# Altium PCB NUC972 DEV BOARD-2 20150128.PcbDoc (part 1 of 5)
Units mil, origin at the board's own origin, x right, y up, seen from the top; angles counter-clockwise.
Board outline 10236.22 x 7677.17 mil, 4 copper layers (Top, 2-GND, 3-POWER, Bottom), stack 35.4 mil thick; 572 components, 593 nets, 2369 pads, 1783 vias.
Unrouted connection lines stored in the file: 1277.
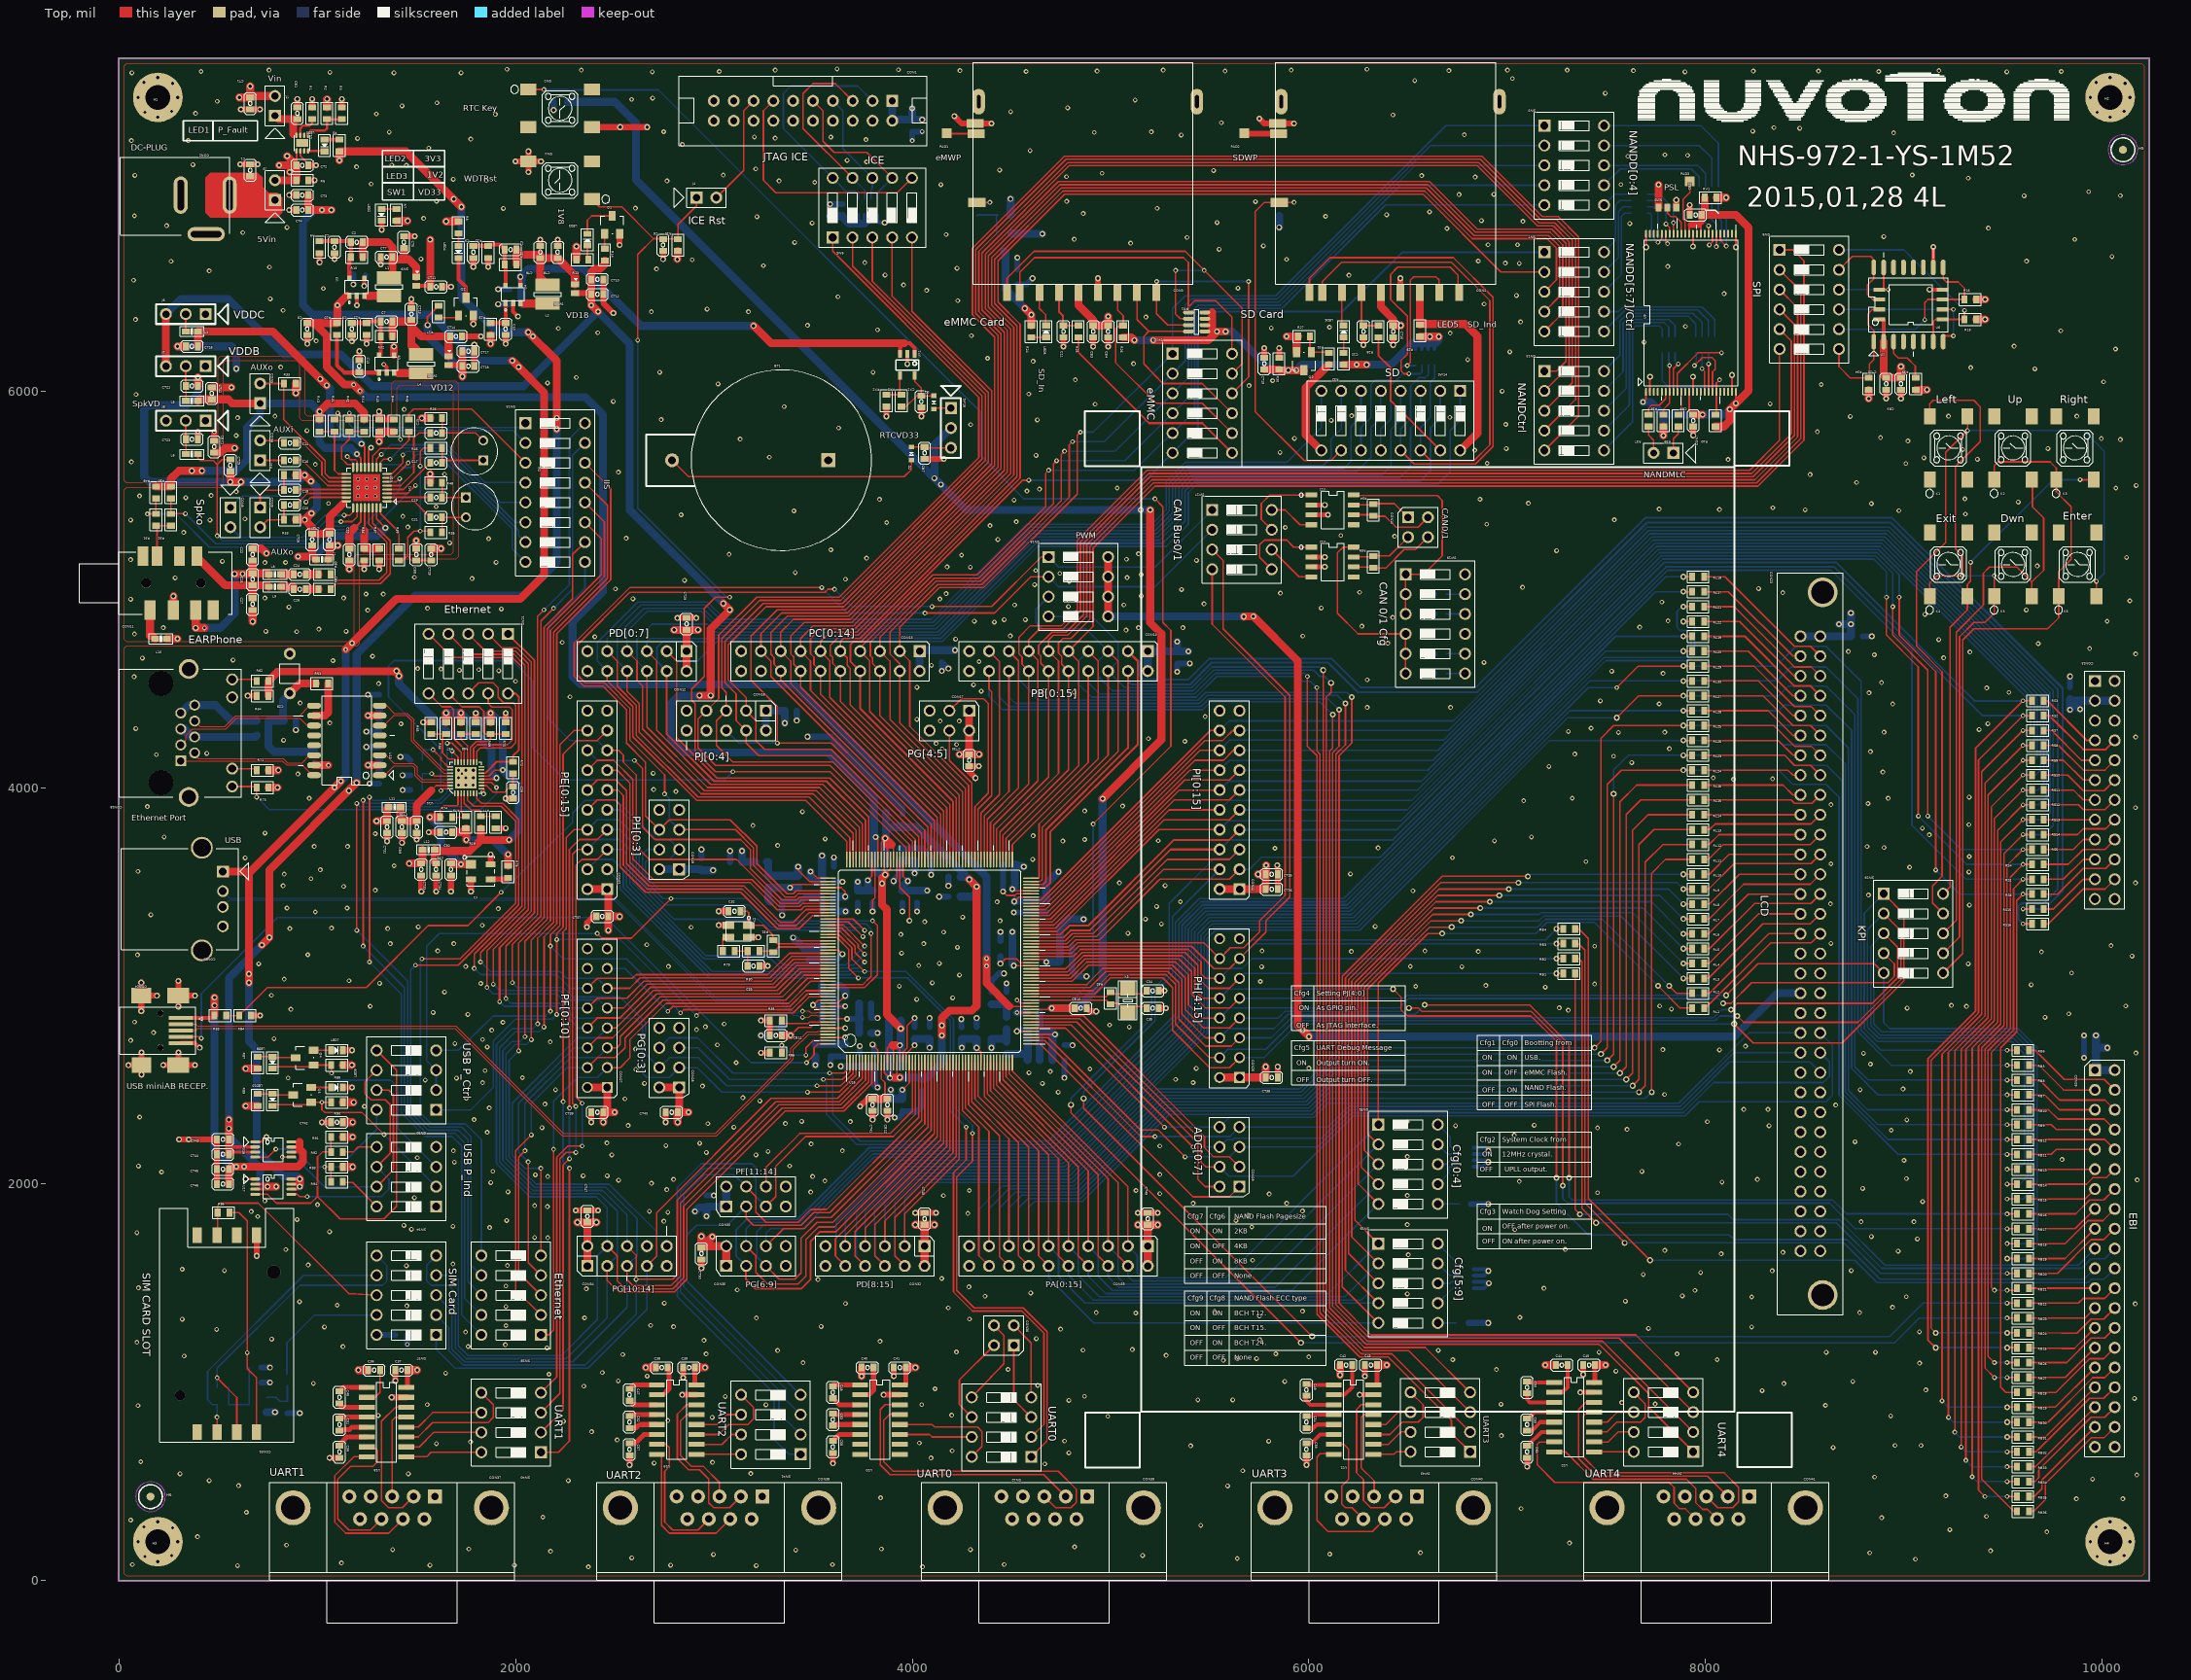
[diagram p0: Top view]
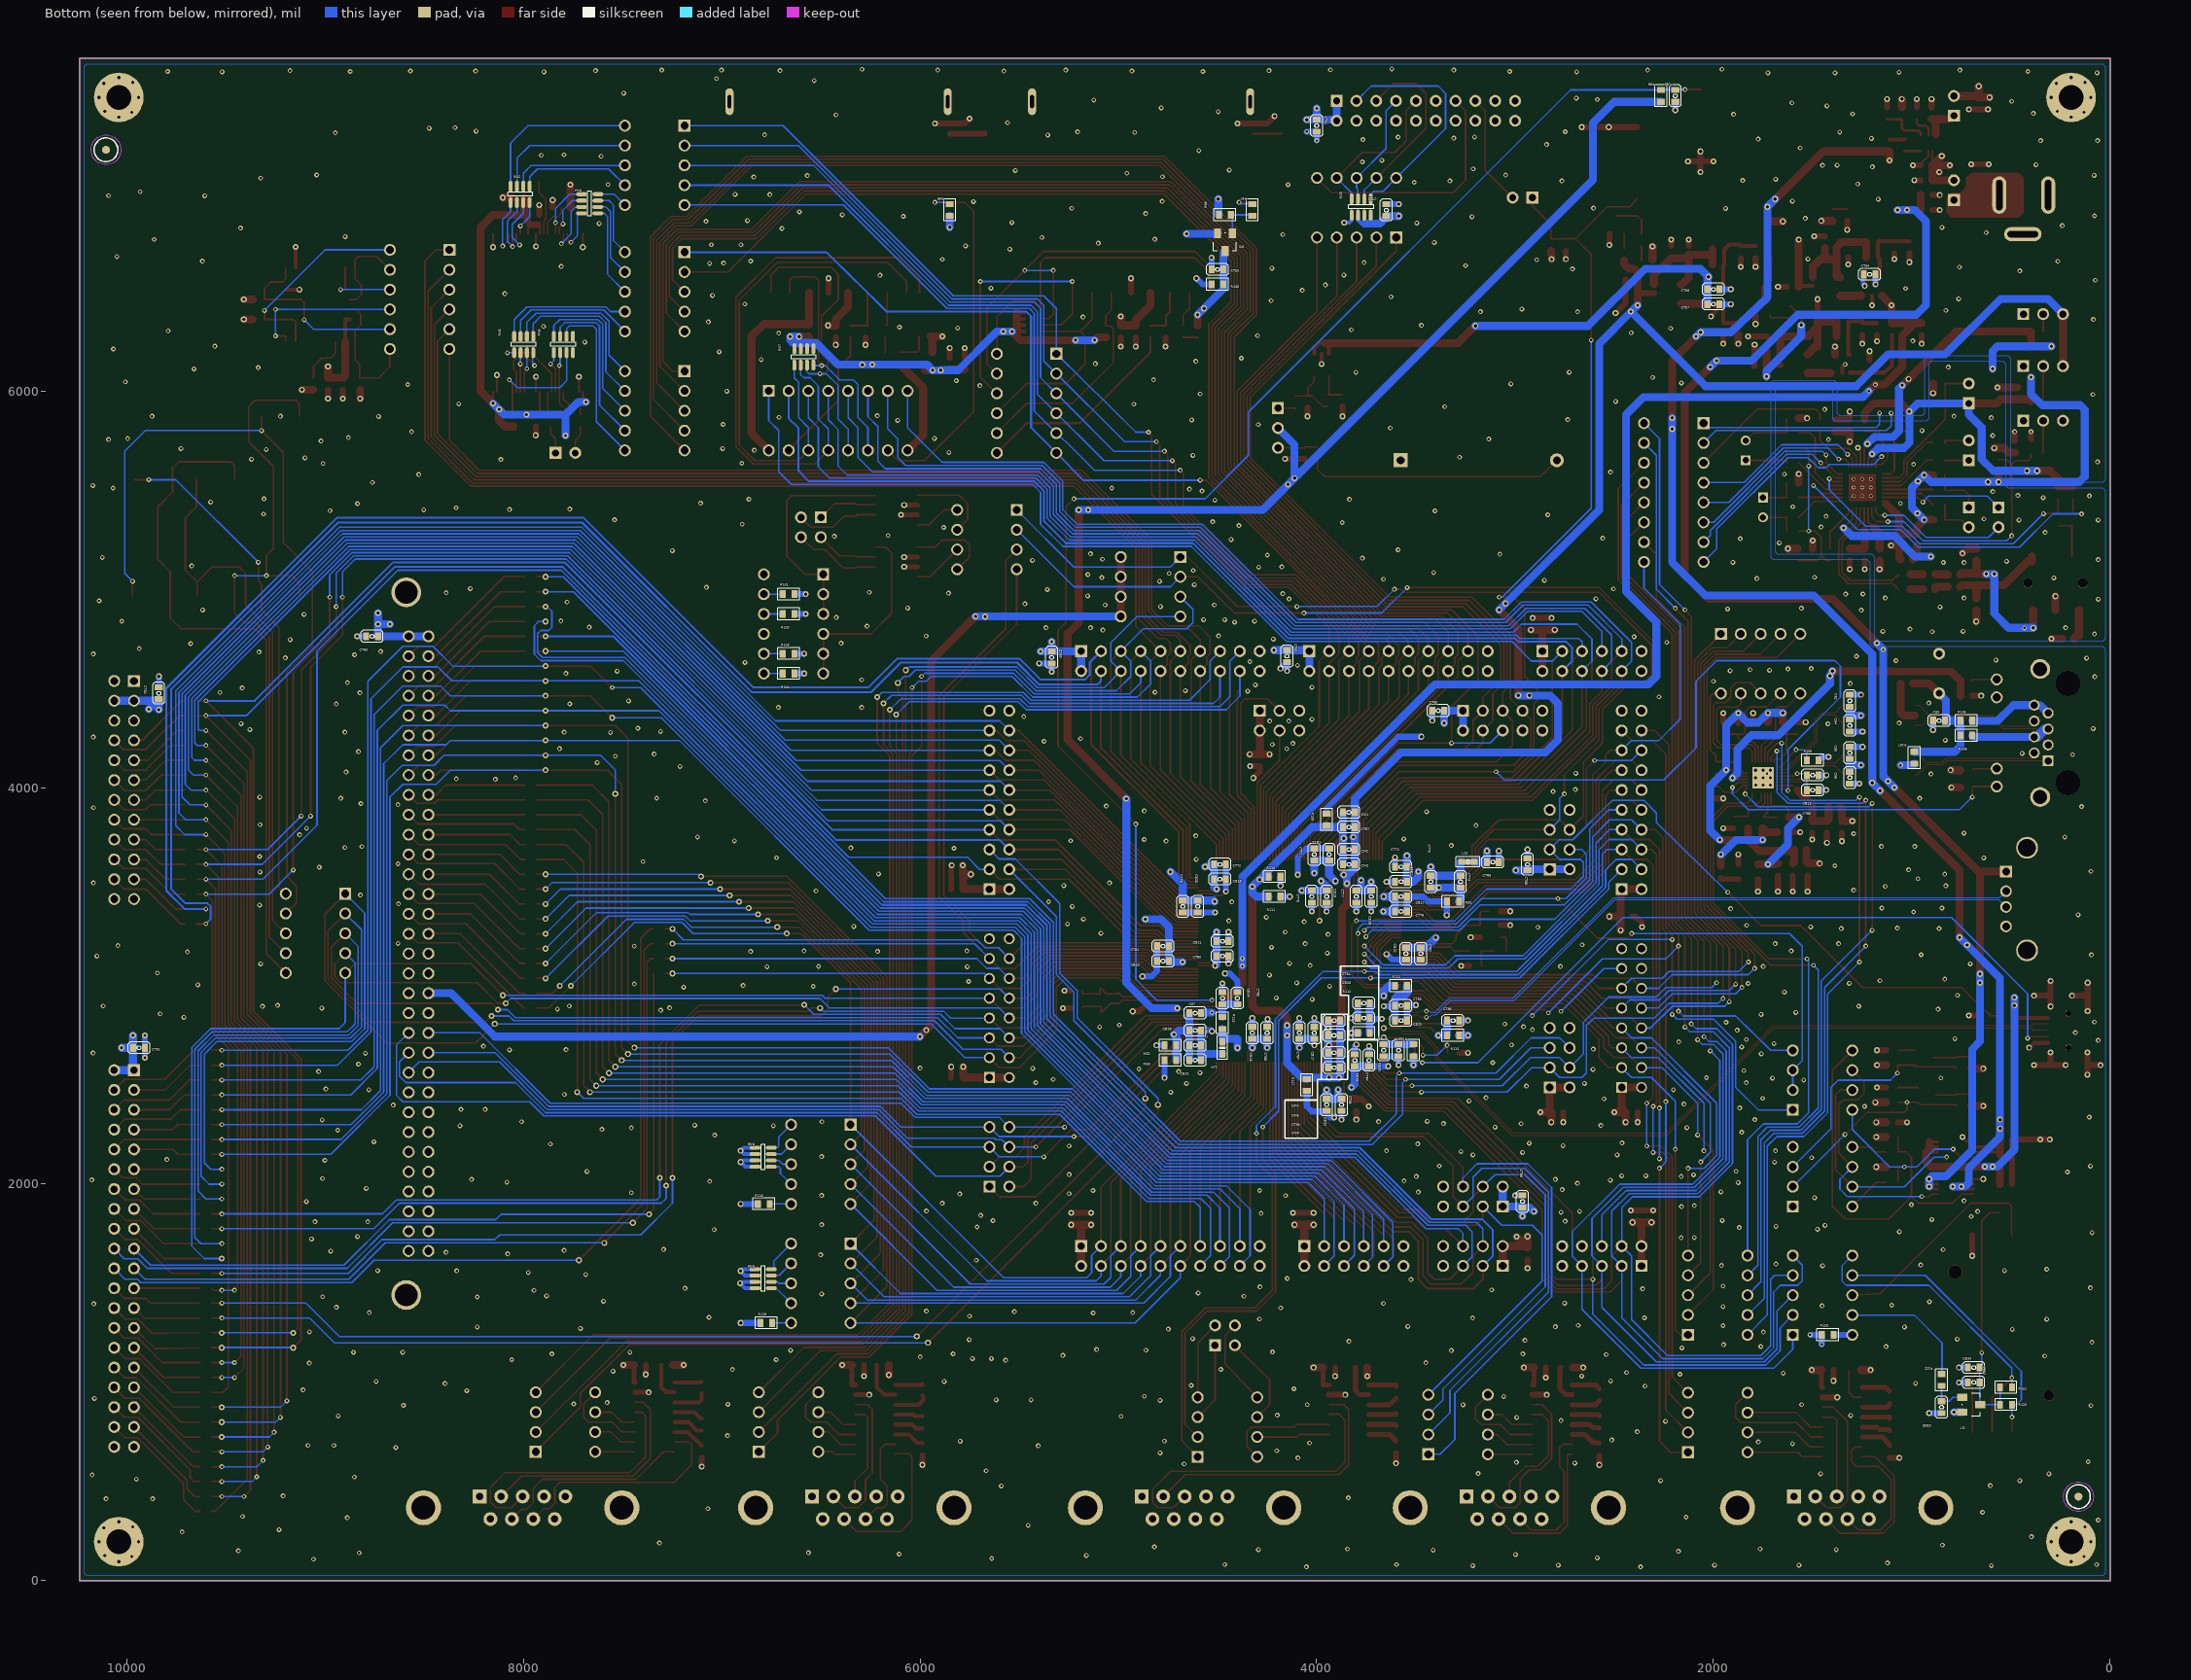
[diagram p1: Bottom view, seen from below]
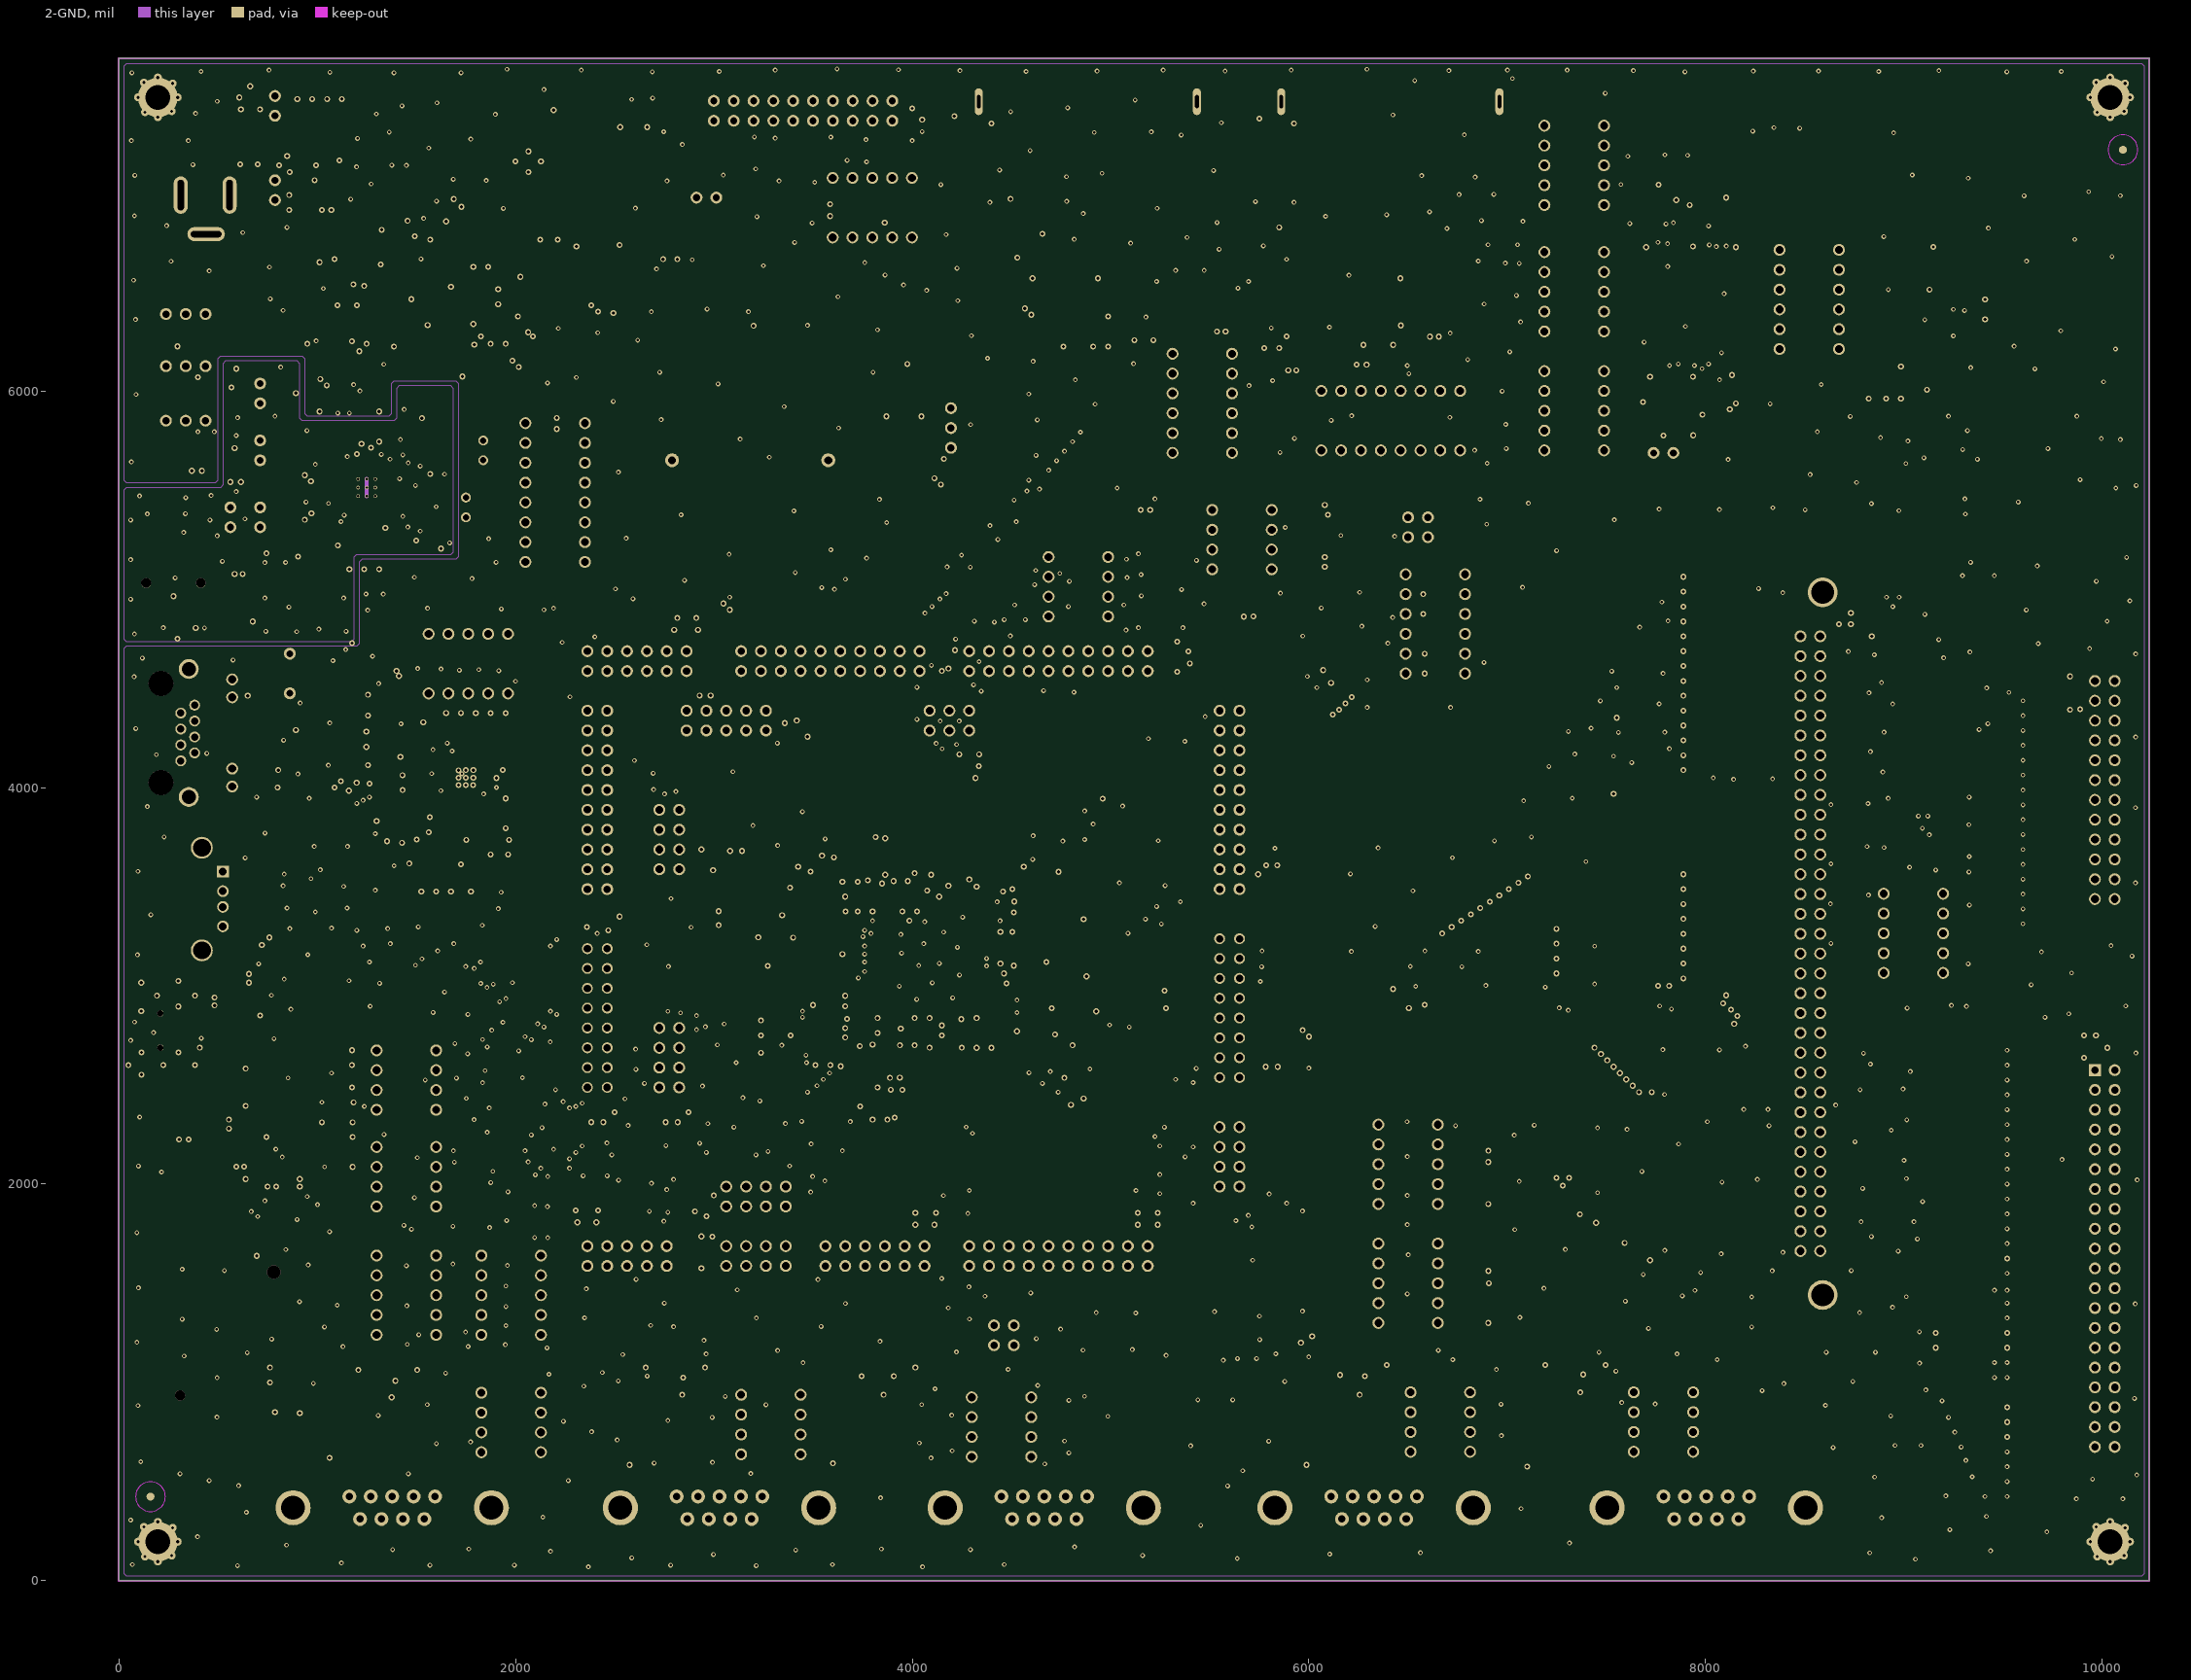
[diagram p2: 2-GND]
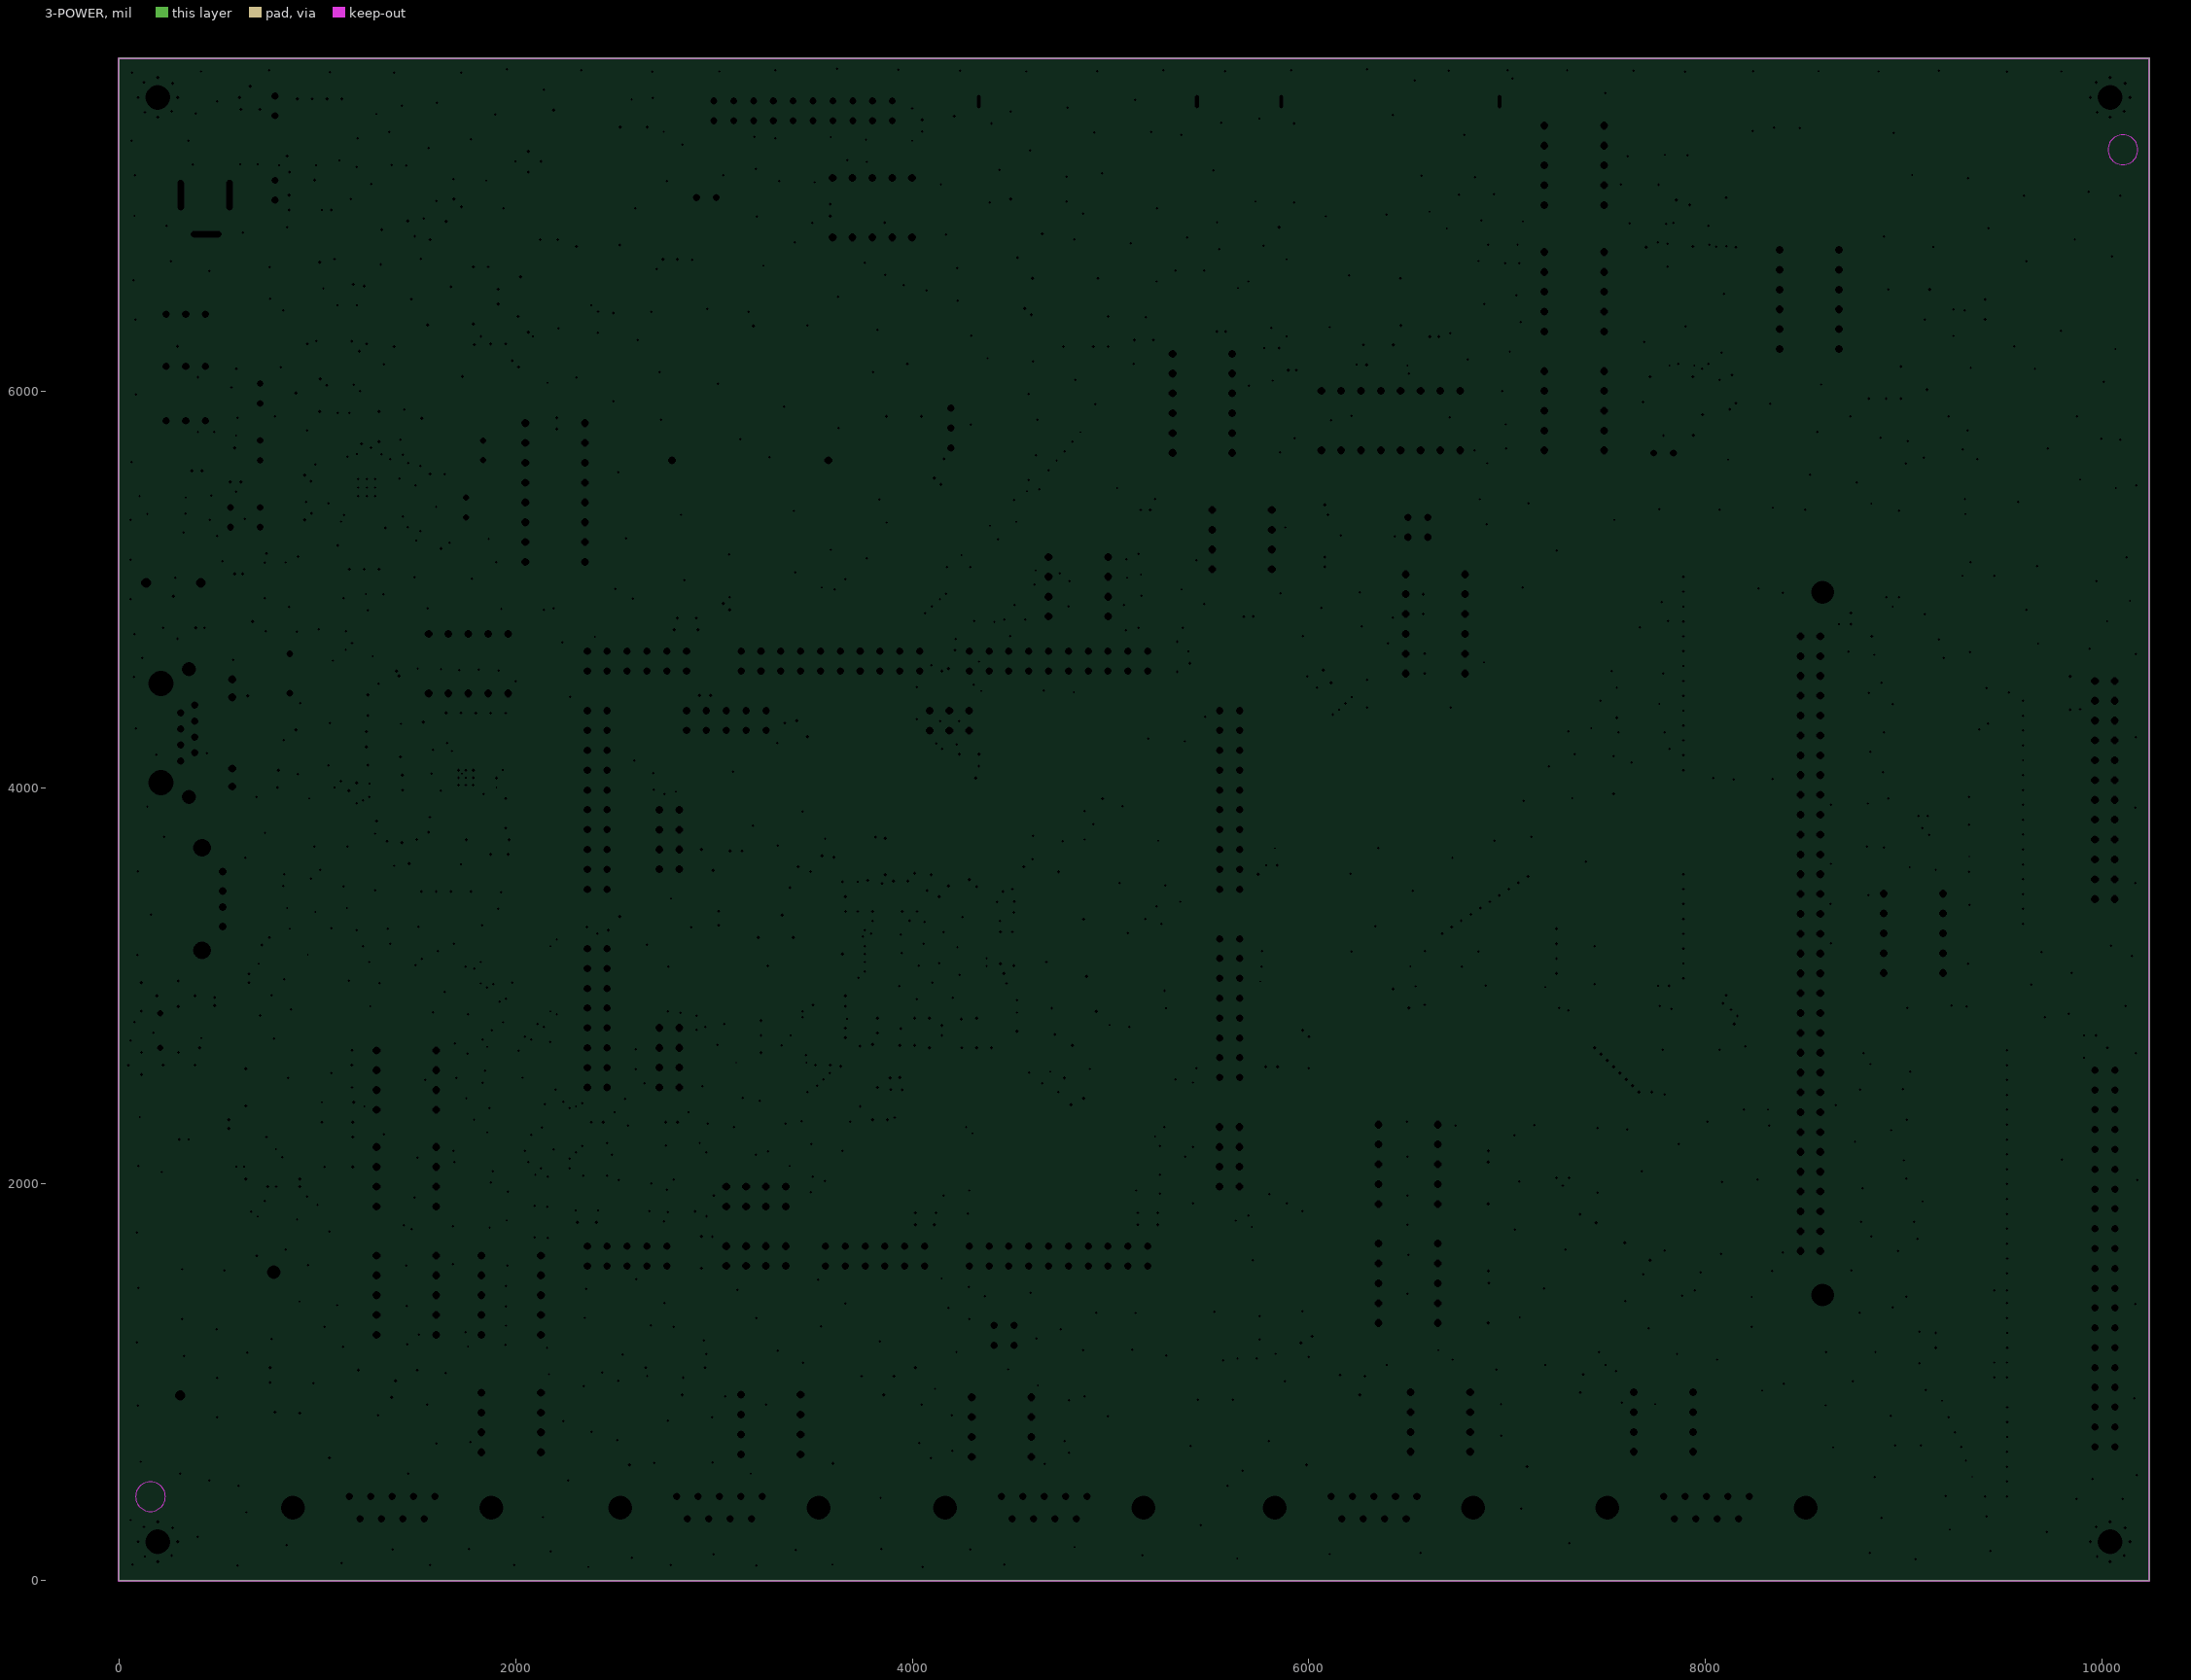
[diagram p3: 3-POWER, clearances drawn from the general rule]

## Layer stack, top to bottom
Solder Mask Top: solder mask 0.4, Solder Resist, Dk 3.5
Top: signal copper 1.35
Dielectric 1: dielectric 10, FR-4, Dk 4.3
2-GND: signal copper 1.35
Dielectric2: dielectric 10, FR-4, Dk 4.3
3-POWER: plane copper 1.35
Dielectric3: dielectric 10, FR-4, Dk 4.3
Bottom: signal copper 1.35
Solder Mask Bottom: solder mask 0.4, Solder Resist, Dk 3.5

## Board outline
0,0 10236.22,0 10236.22,7677.17 0,7677.17

## Design rules (kind name [scope] priority, off if disabled: settings)
Clearance "Clearance - NetClass - ETHERNET-4/8/4-100OHM" [InNetClass('ETHERNET-4/8/4-100OHM')] p1: gap=10 ignorepadtopadclearanceinfootprint=FALSE except(0: Arc-Hole Track-Hole SMDPad-Hole THPad-Hole Via-Hole Fill-Hole Poly-Hole Region-Hole Text-Hole; 7: Arc-SMDPad Arc-THPad Arc-Via Arc-Text Track-SMDPad Track-THPad Track-Via Track-Text SMDPad-SMDPad SMDPad-THPad SMDPad-Via SMDPad-Text THPad-THPad THPad-Via THPad-Text Via-Via Via-Text Fill-Text Poly-Text Region-Text; 8: Arc-Arc Arc-Track Track-Track)
Clearance "Clearance - NetClass - USB-5/7/5-90OHM" [InNetClass('USB-5/7/5-90OHM')] p2: gap=7 ignorepadtopadclearanceinfootprint=FALSE except(0: Arc-Hole Track-Hole SMDPad-Hole THPad-Hole Via-Hole Fill-Hole Poly-Hole Region-Hole Text-Hole; 10: Arc-Fill Arc-Poly Arc-Region Track-Fill Track-Poly Track-Region SMDPad-Fill SMDPad-Poly SMDPad-Region THPad-Fill THPad-Poly THPad-Region Via-Fill Via-Poly Via-Region Fill-Fill Fill-Poly Fill-Region Poly-Poly Poly-Region Region-Region Text-Text)
Clearance "Clearance - Default - DEFAULT - Via" [IsVia vs IsVia] p3: gap=6 ignorepadtopadclearanceinfootprint=FALSE
Clearance "Clearance - Default - DEFAULT- SMD" [IsVia vs IsSMTPin] p4: gap=6 ignorepadtopadclearanceinfootprint=FALSE
Clearance "Clearance - Default - DEFAULT - Net" [All] p5: gap=10 ignorepadtopadclearanceinfootprint=FALSE except(0: Arc-Hole Track-Hole SMDPad-Hole THPad-Hole Via-Hole Fill-Hole Poly-Hole Region-Hole Text-Hole; 5: Arc-SMDPad Arc-THPad Track-SMDPad Track-THPad SMDPad-SMDPad SMDPad-THPad SMDPad-Via THPad-THPad THPad-Via; 7: Arc-Arc Arc-Track Arc-Via Arc-Text Track-Track Track-Via Track-Text SMDPad-Text THPad-Text Via-Via Via-Text Fill-Text Poly-Text Region-Text)
ComponentClearance "ComponentClearance - Default - DEFAULT" [All] p1: gap=6 collisioncheckmode=3 verticalgap=10 showdistances=FALSE
FanoutControl Fanout_SOIC [IsSOIC] p1: bgadir=Out bgaviamode=Centered fanoutstyle=Auto fanoutdirection=Alternating viagrid=1 // Fanout_SOIC (Default Rule)
FanoutControl Fanout_Small [(CompPinCount < 5)] p2: bgadir=Out bgaviamode=Centered fanoutstyle=Auto fanoutdirection=OutThenIn viagrid=1 // Fanout_Small (Default Rule)
FanoutControl Fanout_LCC [IsLCC] p3: bgadir=Out bgaviamode=Centered fanoutstyle=Auto fanoutdirection=Alternating viagrid=1 // Fanout_LCC (Default Rule)
FanoutControl Fanout_BGA [IsBGA] p4: bgadir=Out bgaviamode=Centered fanoutstyle=Auto fanoutdirection=Alternating viagrid=1 // Fanout_BGA (Default Rule)
HoleToHoleClearance "HoleToHoleClearance - Default - DEFAULT" [All] p1: gap=6 allowstackedmicrovias=TRUE
Length "Default Length" [All] p1: maxlimit=50000 minlimit=0
MaxMinImpedance "Default Impedance" [All] p1: minimum=50.00 maximum=150.0
ParallelSegment "Default Parallel Segment Adjasent" [All] p1: limit=1000 gap=200
ParallelSegment "Default Parallel Segment Same Layer" [All] p2: limit=1000 gap=200
PlaneClearance [All] p1: clearance=20
PlaneConnect "Default PlaneConnect" [All] p1: planeconnectstyle=Relief reliefexpansion=20 reliefentries=0 reliefconductorwidth=20 reliefairgap=10
PolygonConnect "PolygonConnect - Default SMT" [IsSMTPin] p1: connectstyle=Relief reliefconductorwidth=10 reliefentries=4 polygonreliefangle="45 Angle" airgapwidth=10
PolygonConnect "PolygonConnect - Default Pad" [All] p2: connectstyle=Relief reliefconductorwidth=20 reliefentries=4 polygonreliefangle="45 Angle" airgapwidth=10
RoutingLayers "RoutingLayers - Default - DEFAULT" [All] p1: top layer_v5=TRUE mid layer 1_v5=TRUE bottom layer_v5=TRUE
RoutingPriority "RoutingPriority - Default - DEFAULT" [All] p1: routingpriority=3
RoutingTopology "RoutingTopology - NetClass - POWER-40MIL" [InNetClass('POWER-40MIL') vs InNetClass('POWER-40MIL')] p1: topology=Shortest
RoutingTopology "Default Routing Topology" [All] p2: topology=Shortest
RoutingVias "RoutingVias - Default - DEFAULT" [All] p1: holewidth=16 width=30 viastyle="Through Hole" minholewidth=16 minwidth=30 maxholewidth=16 maxwidth=30
SMDToCorner "SMDToCorner - Default - DEFAULT" [All] p1: distance=60000
SolderMaskExpansion "SolderMaskExpansion from CAM settings" [All] p1: expansion=3
Width "Width - NetClass - POWER-40MIL" [InNetClass('POWER-40MIL')] p1: maxlimit=100 minlimit=1 preferedwidth=40
Width "Width - NetClass - USB-5/7/5-90OHM" [InNetClass('USB-5/7/5-90OHM')] p2: maxlimit=100 minlimit=1 preferedwidth=5
Width "Width - NetClass - ETHERNET-4/8/4-100OHM" [InNetClass('ETHERNET-4/8/4-100OHM')] p3: maxlimit=100 minlimit=1 preferedwidth=4
Width "Width - NetClass - POWER-30MIL" [InNetClass('POWER-30MIL')] p4: maxlimit=100 minlimit=1 preferedwidth=30
Width "Default Width" [All] p5: maxlimit=100 minlimit=1 preferedwidth=8
19 further rules are at their usual default settings.

## Classes and differential pairs
net class ETHERNET-4/8/4-100OHM: MDI_RN MDI_RP MDI_TN MDI_TP RX+ RX- TX+ TX-
net class POWER-30MIL: VS
net class POWER-40MIL: 5VIN AVD33 AVS CDAVS CDCAVS CDCVS EMVD33 MVS NVD33 PHYAD3 PHYAVD33 PHYIOVD33 PLLVD12 PLLVS SDPWR SDVD33 UDVD33 UHVD33 UOVD33 UPL0VD12 UPL1VD12 VD12 VD18 VD33 VDDA VDDB VDDC VIN VREF
net class USB-5/7/5-90OHM: UDH0 UDH1 UDO0 UDO1

## Components (designator, comment, footprint, x,y, rotation, side; value= is the part's Value field where it differs from the comment)
BT1 "BAT$5C$CR2032-4-2" BAT$5C$CR2032-4-2 3183,5650.5 r0 top
C1 "C0603" C0603 662.5,7112.5 r90 top
C2 "C0603" C0603 1200,6750 r0 top
C3 "C0603" C0603 1975,6712.5 r180 top
C4 "C0603" C0603 1087.5,6725 r90 top
C5 "C0603" C0603 1787.5,6700 r270 top
C6 "C0603" C0603 2744,6736 r90 top
C7 "C0603" C0603 1350,6350 r180 top
C8 "C0603" C0603 950,6312.5 r270 top
C9 "C0603" C0603 1175,6312.5 r270 top
C10 "C0603" C0603 1950,6312.5 r270 top
C11 "C0603" C0603 4762.5,6300 r270 top
C12 "C0603" C0603 6275,6300 r270 top
C13 "C0603" C0603 1212.5,6125 r90 top
C14 "C0603" C0603 862.5,5737.5 r0 top
C15 "C0603" C0603 1600,5787.5 r0 top
C16 "C0603" C0603 862.5,5650 r0 top
C17 "C0603" C0603 1600,5637.5 r0 top
C18 "C0603" C0603 862.5,5500 r0 top
C19 "C0603" C0603 1600,5462.5 r0 top
C20 "C0603" C0603 862.5,5425 r0 top
C21 "C0603" C0603 1600,5362.5 r0 top
C22 "C0603" C0603 675,5175 r270 top
C23 "C0603" C0603 1162.5,5175 r90 top
C24 "C0603" C0603 912.5,5075 r0 top
C25 "C0603" C0603 675,5050 r90 top
C26 "C0603" C0603 912.5,5000 r0 top
C27 "C0603" C0603 675,4925 r90 top
C28 "CK05" CK05 862.5,4575 r90 top
C29 "C0603" C0603 1987.5,3975 r270 top
C30 "C0603" C0603 1650,3775 r180 top
C31 "C0603" C0603 1674.5,3587 r270 top
C32 "C0603" C0603 3104,3376 r180 top
C33 "C0603" C0603 3200,3100 r0 top
C34 "C0603" C0603 5212.5,2975 r0 top
C35 "C0603" C0603 5212.5,2887.5 r0 top
C36 "C0603" C0603 1287.5,1062.5 r180 top
C37 "C0603" C0603 1425,1062.5 r180 top
C38 "C0603" C0603 2737.5,1075 r180 top
C39 "C0603" C0603 2875,1075 r180 top
C40 "C0603" C0603 3775,1075 r180 top
C41 "C0603" C0603 3937.5,1075 r180 top
C42 "C0603" C0603 6187.5,1087.5 r180 top
C43 "C0603" C0603 6312.5,1087.5 r180 top
C44 "C0603" C0603 7275,1087.5 r180 top
C45 "C0603" C0603 7412.5,1087.5 r180 top
C46 "C0603" C0603 1112.5,925 r90 top
C47 "C0603" C0603 2575,937.5 r90 top
C48 "C0603" C0603 3600,950 r90 top
C49 "C0603" C0603 5987.5,962.5 r90 top
C50 "C0603" C0603 7100,975 r90 top
C51 "C0603" C0603 1112.5,787.5 r90 top
C52 "C0603" C0603 2575,800 r90 top
C53 "C0603" C0603 3600,812.5 r90 top
C54 "C0603" C0603 5987.5,800 r90 top
C55 "C0603" C0603 7100,787.5 r90 top
C56 "C0603" C0603 1112.5,650 r90 top
C57 "C0603" C0603 2575,662.5 r90 top
C58 "C0603" C0603 3600,675 r90 top
C59 "C0603" C0603 5987.5,662.5 r90 top
C60 "C0603" C0603 7100,650 r90 top
C61 "C0603" C0603 2192,7488 r270 bottom
C62 "C0603" C0603 1312.5,4437.5 r90 bottom
C63 "C0603" C0603 862.5,4337.5 r0 bottom
C64 "C0603" C0603 1312.5,4312.5 r270 bottom
C65 "C0603" C0603 1312.5,4175 r90 bottom
C66 "C0603" C0603 1312.5,4050 r270 bottom
C67 "C0603" C0603 4612.5,2862.5 r180 bottom
CB1 "C0603" C0603 900,7400 r90 top
CB2 "C0603" C0603 7950,6887.5 r180 top
CB3 "C0603" C0603 4912.5,6300 r90 top
CB4 "C0603" C0603 4987.5,6300 r90 top
CB5 "C0603" C0603 8985,6036 r270 top
CB6 "C0603" C0603 7937.5,5850 r270 top
CB7 "C0603" C0603 4062.5,5687.5 r270 top
CB8 "C0603" C0603 1500,5175 r270 top
CB9 "C0603" C0603 1427.5,3801 r90 top
CB10 "C0603" C0603 4850,2887.5 r0 top
CB11 "C0603" C0603 3312.5,2750 r180 top
CB12 "C0603" C0603 3875,2400 r270 top
CB13 "C0603" C0603 1499.5,4062 r0 bottom
CB14 "C0603" C0603 3937.5,3662.5 r90 bottom
CB15 "C0603" C0603 3575,3525 r0 bottom
CB16 "C0603" C0603 4487.5,3537.5 r180 bottom
CB17 "C0603" C0603 3575,3450 r180 bottom
CB18 "C0603" C0603 3725,3450 r270 bottom
CB19 "C0603" C0603 3950,3450 r270 bottom
CB20 "C0603" C0603 4600,3400 r270 bottom
CB21 "C0603" C0603 4475,3225 r180 bottom
CB22 "C0603" C0603 3550,3162.5 r270 bottom
CB23 "C0603" C0603 4775,3125 r0 bottom
CB24 "C0603" C0603 4475,2937.5 r90 bottom
CB25 "C0603" C0603 3575,2825 r180 bottom
CB26 "C0603" C0603 3762.5,2837.5 r0 bottom
CB27 "C0603" C0603 4012.5,2762.5 r90 bottom
CB28 "C0603" C0603 4325,2762.5 r90 bottom
CB29 "C0603" C0603 4612.5,2775 r0 bottom
CB30 "C0603" C0603 3662.5,2675 r270 bottom
CB31 "C0603" C0603 4612.5,2625 r180 bottom
CB32 "C0603" C0603 3808,2624 r90 bottom
CB33 "C0603" C0603 3950,2400 r270 bottom
CB34 "C0603" C0603 687.5,1075 r180 bottom
CB35 "C0603" C0603 850,875 r90 bottom
CBX1 "C0603" C0603 481.25,5718.75 r270 top
CM1 "C0603" C0603 3837.5,3875 r0 bottom
CM2 "C0603" C0603 3837.5,3687.5 r0 bottom
CM3 "C0603" C0603 3837.5,3612.5 r0 bottom
CM4 "C0603" C0603 3912.5,2825 r180 bottom
CM5 "C0603" C0603 3912.5,2750 r180 bottom
CM6 "C0603" C0603 3912.5,2587.5 r180 bottom
CON1 "HEADER10X2$5C$BOX" HEADER10X2$5C$BOX 3900,7462.5 r0 top
CON2 "POWRJACK$5C$3P" POWRJACK$5C$3P 312.5,6987.5 r90 top
CON3 "AXA2R63061" AXA2R63061 4862.5,6537.5 r180 top
CON4 "AXA2R63061" AXA2R63061 6387.5,6537.5 r180 top
CON5 "SIP$5C$2P-2.54M" SIP$5C$2P-2.54M 712.5,5937.5 r90 top
CON6 "SIP$5C$2P-2.54M" SIP$5C$2P-2.54M 712.5,5650 r90 top
CON7 "SIP$5C$2P-2.54M" SIP$5C$2P-2.54M 7837.5,5687.5 r180 top
CON8 "SIP$5C$2P-2.54M" SIP$5C$2P-2.54M 562.5,5412.5 r270 top
CON9 "SIP$5C$2P-2.54M" SIP$5C$2P-2.54M 712.5,5412.5 r270 top
CON10 "HEADER2X2" HEADER2X2 6500,5362.5 r270 top
CON11 "JACK$5C$PJK-691" JACK$5C$PJK-691 0,5031.2 r0 top
CON12 "HEADER_2X6_2.54MM" HEADER_2X6_2.54MM 2862.5,4687.5 r180 top
CON13 "HEADER10X2$5C$2.54" HEADER10X2$5C$2.54 4037.5,4687.5 r180 top
CON14 "HEADER10X2$5C$2.54" HEADER10X2$5C$2.54 5187.5,4687.5 r180 top
CON15 "HEADER12X2-2.54M" HEADER12X2-2.54M 9962.5,4537.5 r270 top
CON16 "CON$2F$5X2B$2F$2.54$2F$M" CON$2F$5X2B$2F$2.54$2F$M 3262.5,4387.5 r180 top
CON17 "HEADER_2X3_2.54MM" HEADER_2X3_2.54MM 4287.5,4387.5 r180 top
CON18 "RJ45-8P8C$2F$LED" RJ45-8P8C$2F$LED 212.5,4275 r270 top
CON19 "HEADER2X4" HEADER2X4 2825,3587.5 r90 top
CON20 "USB4P_ATYPE" USB4P_ATYPE 525,3437.5 r270 top
CON21 "HEADER10X2$5C$2.54" HEADER10X2$5C$2.54 2462.5,3487.5 r90 top
CON22 "HEADER10X2$5C$2.54" HEADER10X2$5C$2.54 5650,3487.5 r90 top
CON23 "M_DIN_32X2$2F$2.54A" M_DIN_32X2$2F$2.54A 8528.15,3212.6 r270 top
CON24 "MINI_5P_B_TYPE" MINI_5P_B_TYPE 300,2950 r90 top
CON25 "HEADER8X2$5C$2.54" HEADER8X2$5C$2.54 5650,2537.5 r90 top
CON26 "HEAD20X2-2.54M" HEAD20X2-2.54M 9962.5,2575 r270 top
CON27 "HEADER8X2$5C$2.54" HEADER8X2$5C$2.54 2462.5,2487.5 r90 top
CON28 "HEADER2X4" HEADER2X4 2825,2487.5 r90 top
CON29 "HEADER2X4" HEADER2X4 5650,1987.5 r90 top
CON30 "HEADER2X4" HEADER2X4 3062.5,1887.5 r0 top
CON31 "SIM-CARD" SIM-CARD 545,1742 r270 top
CON32 "HEADER_2X6_2.54MM" HEADER_2X6_2.54MM 4062.5,1687.5 r180 top
CON33 "HEADER10X2$5C$2.54" HEADER10X2$5C$2.54 5187.5,1687.5 r180 top
CON34 "CON$2F$5X2B$2F$2.54$2F$M" CON$2F$5X2B$2F$2.54$2F$M 2362.5,1587.5 r0 top
CON35 "HEADER2X4" HEADER2X4 3062.5,1587.5 r0 top
CON36 "HEADER2X2" HEADER2X2 4512.5,1187.5 r90 top
CON37 "DB9FM-L" DB9FM-L 1162.5,425 r0 top
CON38 "DB9FM-L" DB9FM-L 2812.5,425 r0 top
CON39 "DB9FM-L" DB9FM-L 4450,425 r0 top
CON40 "DB9FM-L" DB9FM-L 6112.5,425 r0 top
CON41 "DB9FM-L" DB9FM-L 7787.5,425 r0 top
CT1 "C0603" C0603 662.5,7450 r270 top
CT2 "C0603" C0603 925,7137.5 r180 top
CT3 "C0603" C0603 925,6987.5 r0 top
CT4 "C0603" C0603 925,6912.5 r0 top
CT5 "C0603" C0603 1437.5,6750 r90 top
CT6 "C0603" C0603 2125,6700 r90 top
CT7 "C0603" C0603 1350,6675 r180 top
CT8 "C0603" C0603 2212.5,6700 r90 top
CT10 "C0603" C0603 2412.5,6562.5 r0 top
CT11 "C0603" C0603 1600,6525 r0 top
CT12 "C0603" C0603 2412.5,6487.5 r0 top
CT13 "C0603" C0603 1475,6387.5 r90 top
CT14 "C0603" C0603 1700,6275 r0 top
CT15 "C0603" C0603 6425,6300 r90 top
CT16 "C0603" C0603 368.75,6225 r0 top
CT17 "C0603" C0603 1762.5,6200 r0 top
CT18 "C0603" C0603 1762.5,6125 r0 top
CT19 "C0603" C0603 5775,6137.5 r270 top
CT20 "C0603" C0603 8910,6036 r270 top
CT21 "C0603" C0603 368.75,6025 r180 top
CT22 "C0603" C0603 468.75,5987.5 r270 top
CT23 "C0603" C0603 368.75,5756.25 r180 top
CT25 "C0603" C0603 562.5,5625 r90 top
CT26 "C0603" C0603 975,5250 r270 top
CT27 "C0603" C0603 1062.5,5250 r270 top
CT28 "C0603" C0603 1575,5175 r270 top
CT29 "C0603" C0603 2862.5,4825 r270 top
CT30 "C0603" C0603 4287.5,4137.5 r90 top
CT31 "C0603" C0603 1352.5,3801 r270 top
CT32 "C0603" C0603 1502.5,3801 r270 top
CT33 "C0603" C0603 1524.5,3587 r270 top
CT34 "C0603" C0603 1599.5,3587 r270 top
CT35 "C0603" C0603 5812.5,3562.5 r180 top
CT36 "C0603" C0603 5812.5,3487.5 r180 top
CT37 "C0603" C0603 2437.5,3350 r0 top
CT38 "C0603" C0603 5812.5,2537.5 r180 top
CT39 "C0603" C0603 2412.5,2362.5 r0 top
CT40 "C0603" C0603 2787.5,2362.5 r0 top
CT41 "C0603" C0603 3800,2400 r270 top
CT42 "C0603" C0603 1100,2312 r0 top
CT43 "C0603" C0603 525,2225.5 r0 top
CT44 "C0603" C0603 525,2150.5 r0 top
CT45 "C0603" C0603 525,2075.5 r0 top
CT46 "C0603" C0603 525,2000.5 r0 top
CT47 "C0603" C0603 2362.5,1837.5 r270 top
CT48 "C0603" C0603 4062.5,1825 r270 top
CT49 "C0603" C0603 5187.5,1825 r270 top
CT50 "C0603" C0603 2937.5,1650 r90 top
CT51 "C0603" C0603 4000,7337.5 r90 bottom
CT52 "C0603" C0603 3649,6911.5 r270 bottom
CT54 "C0603" C0603 1212.5,6587.5 r180 bottom
CT55 "C0603" C0603 4500,6612.5 r180 bottom
CT56 "C0603" C0603 2000,6512.5 r180 bottom
CT57 "C0603" C0603 2000,6437.5 r180 bottom
CT60 "C0603" C0603 8762.5,4762.5 r180 bottom
CT62 "C0603" C0603 4150,4662.5 r90 bottom
CT63 "C0603" C0603 5336,4656 r90 bottom
CT64 "C0603" C0603 9837.5,4475 r270 bottom
CT65 "C0603" C0603 3387.5,4387.5 r180 bottom
CT66 "C0603" C0603 1499.5,3987 r180 bottom
CT67 "C0603" C0603 3837.5,3800 r0 bottom
CT68 "C0603" C0603 2937.5,3612.5 r270 bottom
CT69 "C0603" C0603 3112,3624 r180 bottom
CT70 "C0603" C0603 3575,3600 r0 bottom
CT71 "C0603" C0603 4012.5,3662.5 r90 bottom
CT72 "C0603" C0603 4487.5,3612.5 r180 bottom
CT73 "C0603" C0603 3275,3525 r270 bottom
CT75 "C0603" C0603 3425,3525 r90 bottom
CT76 "C0603" C0603 3575,3375 r180 bottom
CT77 "C0603" C0603 3800,3450 r270 bottom
CT78 "C0603" C0603 4025,3450 r270 bottom
CT79 "C0603" C0603 4675,3400 r270 bottom
CT80 "C0603" C0603 4475,3150 r180 bottom
CT81 "C0603" C0603 4775,3200 r0 bottom
CT82 "C0603" C0603 3475,3162.5 r270 bottom
CT83 "C0603" C0603 3575,2900 r180 bottom
CT84 "C0603" C0603 3762.5,2912.5 r0 bottom
CT85 "C0603" C0603 4400,2937.5 r90 bottom
CT86 "C0603" C0603 3312.5,2825 r180 bottom
CT87 "C0603" C0603 4087.5,2762.5 r90 bottom
CT88 "C0603" C0603 4250,2762.5 r90 bottom
CT90 "C0603" C0603 4612.5,2700 r180 bottom
CT91 "C0603" C0603 9937.5,2687.5 r0 bottom
CT92 "C0603" C0603 3587.5,2675 r270 bottom
CT93 "C0603" C0603 3912.5,2662.5 r180 bottom
CT94 "C0603" C0603 3736,2624 r90 bottom
CT95 "C0603" C0603 3875,2400 r270 bottom
CT96 "C0603" C0603 2962.5,1912.5 r270 bottom
CT97 "C0603" C0603 687.5,1000 r180 bottom
CX1 "C0603" C0603 4046,5946.5 r270 top
D1 "DIDEO_A" DIDEO_A 4108,5975.5 r270 top
D2 "DIDEO_A" DIDEO_A 3995.5,5650.5 r90 top
H1 "H-250" H-250 196.85,7480.31 r0 top
H2 "H-250" H-250 10039.37,7480.31 r0 top
H3 "H-250" H-250 196.85,196.85 r0 top
H4 "H-250" H-250 10039.37,196.85 r0 top
H5 "VIA40N(F_MASK)4L" VIA40N(F_MASK)4L 10104,7216 r0 top
H6 "VIA40N(F_MASK)4L" VIA40N(F_MASK)4L 160,424 r0 top
J2 "SIP$5C$2P-2.54M" SIP$5C$2P-2.54M 787.5,7387.5 r90 top
J3 "SIP$5C$2P-2.54M" SIP$5C$2P-2.54M 787.5,6962.5 r90 top
J4 "SIP$5C$2P-2.54M" SIP$5C$2P-2.54M 2912.5,6975 r0 top
J6 "SIP-3P-2.54M" SIP-3P-2.54M 437.5,6387.5 r180 top
J7 "SIP-3P-2.54M" SIP-3P-2.54M 437.5,6125 r180 top
J8 "SIP-3P-2.54M" SIP-3P-2.54M 437.5,5850 r180 top
K1 "SW4-SMD" SW4-SMD 9225,5712.5 r0 top
K2 "SW4-SMD" SW4-SMD 9550,5712.5 r0 top
K3 "SW4-SMD" SW4-SMD 9862.5,5712.5 r0 top
K4 "SW4-SMD" SW4-SMD 9225,5125 r0 top
K5 "SW4-SMD" SW4-SMD 9550,5125 r0 top
K6 "SW4-SMD" SW4-SMD 9875,5125 r0 top
L1 "SMTDR43" SMTDR43 1362.5,6525 r180 top
L2 "SMTDR43" SMTDR43 2162.5,6487.5 r180 top
L3 "L0603" L0603 368.75,6300 r180 top
L4 "SMTDR43" SMTDR43 1525,6137.5 r180 top
L5 "L0603" L0603 368.75,5950 r180 top
L6 "L0603" L0603 368.75,5681.25 r180 top
L7 "L0603" L0603 1025,5150 r0 top
L8 "L0603" L0603 787.5,5075 r180 top
L9 "L0603" L0603 787.5,5012.5 r180 top
L10 "L0603" L0603 212.5,4750 r180 top
L11 "L0603" L0603 1390,3901 r0 top
L12 "L0603" L0603 1562,3687 r0 top
L13 "L0603" L0603 3237.5,3625 r0 bottom
L14 "L0603" L0603 4475,2687.5 r270 bottom
LED1 "LED_0603" LED_0603 1037.5,7237.5 r270 top
LED2 "LED_0603" LED_0603 1325,6887.5 r270 top
LED3 "LED_0603" LED_0603 2362.5,6762.5 r90 top
LED4 "LED_0603" LED_0603 1712.5,6700 r270 top
LED5 "LED_0603" LED_0603 4675,6300 r90 top
LED6 "LED_0603" LED_0603 6175,6300 r90 top
LED7 "LED_0603" LED_0603 1100,2675 r0 top
LED8 "LED_0603" LED_0603 775,2612.5 r270 top
LED9 "LED_0603" LED_0603 1100,2487.5 r0 top
LED10 "LED_0603" LED_0603 775,2425 r270 top
M1 "9.7D2.54MM" 9.7D2.54MM 1837.5,5700 r90 top
M2 "9.7D2.54MM" 9.7D2.54MM 1750,5412.5 r270 top
PAD1 "1PAD_1.25X1.25MM" 1PAD_1.25X1.25MM 4175,7300 r180 top
PAD2 "1PAD_1.25X1.25MM" 1PAD_1.25X1.25MM 5675,7300 r180 top
PAD3 "1PAD_1.25X1.25MM" 1PAD_1.25X1.25MM 7920,7056 r0 top
Q1 "SOT23-BEC" SOT23-BEC 2487.5,6837.5 r0 top
Q2 "SOT23-BEC" SOT23-BEC 1750,6425 r0 top
Q3 "SOT23-GSD" SOT23-GSD 5975,6150 r180 top
Q4 "SOT23-BEC" SOT23-BEC 937.5,2637.5 r90 top
Q5 "SOT23-BEC" SOT23-BEC 925,2450 r90 top
Q6 "SOT23-GSD" SOT23-GSD 4462.5,6750 r0 bottom
Q7 "SOT23-GSD" SOT23-GSD 700,887.5 r270 bottom
R1 "R0603" R0603 975,7400 r270 top
R2 "R0603" R0603 1050,7400 r270 top
R3 "R0603" R0603 1125,7400 r90 top
R5 "R0603" R0603 1112.5,7237.5 r270 top
R6 "R0603" R0603 925,7062.5 r180 top
R7 "R0603" R0603 1400,6887.5 r270 top
R8 "R0603" R0603 1712.5,6825 r90 top
R9 "R0603" R0603 1012.5,6725 r90 top
R10 "R0603" R0603 1200,6675 r0 top
R11 "R0603" R0603 1862.5,6700 r90 top
R12 "R0603" R0603 1975,6637.5 r0 top
R13 "R0603" R0603 2337.5,6662.5 r180 top
R14 "R0603" R0603 2450,6687.5 r270 top
R15 "R0603" R0603 2819,6736 r90 top
R16 "R0603" R0603 9335,6461 r0 top
R17 "R0603" R0603 1612.5,6400 r90 top
R18 "R0603" R0603 9335,6361 r0 top
R20 "R0603" R0603 1100,6312.5 r90 top
R21 "R0603" R0603 1250,6312.5 r90 top
R22 "R0603" R0603 1350,6275 r0 top
R23 "R0603" R0603 1875,6312.5 r90 top
R24 "R0603" R0603 4600,6300 r270 top
R25 "R0603" R0603 4837.5,6300 r270 top
R26 "R0603" R0603 5062.5,6300 r270 top
R27 "R0603" R0603 5975,6275 r180 top
R28 "R0603" R0603 6350,6300 r270 top
R29 "R0603" R0603 6560,6304 r270 top
R30 "R0603" R0603 5850,6137.5 r270 top
R31 "R0603" R0603 6100,6162.5 r90 top
R32 "R0603" R0603 6175,6162.5 r90 top
R33 "R0603" R0603 862.5,6037.5 r180 top
R34 "R0603" R0603 8822.5,6036 r270 top
R35 "R0603" R0603 9060,6036 r90 top
R36 "R0603" R0603 1600,5862.5 r0 top
R37 "R0603" R0603 7712.5,5850 r90 top
R38 "R0603" R0603 7787.5,5850 r270 top
R39 "R0603" R0603 7862.5,5850 r90 top
R40 "R0603" R0603 8050,5850 r270 top
R41 "R0603" R0603 1087.5,5825 r270 top
R42 "R0603" R0603 1162.5,5825 r270 top
R43 "R0603" R0603 1312.5,5825 r90 top
R44 "R0603" R0603 1387.5,5825 r90 top
R45 "R0603" R0603 1462.5,5825 r270 top
R46 "R0603" R0603 1600,5712.5 r180 top
R47 "R0603" R0603 862.5,5575 r180 top
R48 "R0603" R0603 1600,5537.5 r180 top
R49 "R0603" R0603 187.5,5487.5 r270 top
R50 "R0603" R0603 262.5,5487.5 r270 top
R51 "R0603" R0603 187.5,5350 r90 top
R52 "R0603" R0603 262.5,5350 r90 top
R53 "R0603" R0603 862.5,5350 r180 top
R54 "R0603" R0603 6325,5400 r270 top
R55 "R0603" R0603 1600,5287.5 r180 top
R56 "R0603" R0603 1237.5,5175 r270 top
R57 "R0603" R0603 1312.5,5175 r270 top
R58 "R0603" R0603 1412.5,5175 r270 top
R59 "R0603" R0603 6325,5137.5 r270 top
R60 "R0603" R0603 1037.5,5075 r180 top
R61 "R0603" R0603 1037.5,5000 r180 top
R62 "R0603" R0603 725,4537.5 r180 top
R63 "R0603" R0603 1025,4525 r0 top
R64 "R0603" R0603 725,4462.5 r180 top
R65 "R0603" R0603 1575,4300 r270 top
R66 "R0603" R0603 1650,4300 r90 top
R67 "R0603" R0603 1725,4300 r90 top
R68 "R0603" R0603 1800,4300 r270 top
R69 "R0603" R0603 1875,4300 r90 top
R70 "R0603" R0603 1950,4300 r270 top
R71 "R0603" R0603 725,4087.5 r180 top
R72 "R0603" R0603 1987.5,4100 r270 top
R73 "R0603" R0603 725,4000 r180 top
R74 "R0603" R0603 1650,3850 r180 top
R75 "R0603" R0603 1750,3825 r270 top
R76 "R0603" R0603 1825,3825 r270 top
R77 "R0603" R0603 1900,3825 r90 top
R78 "R0603" R0603 1962.5,3575 r90 top
R79 "R0603" R0603 3075,3175 r0 top
R80 "R0603" R0603 3200,3175 r180 top
R81 "R0603" R0603 3300,3200 r90 top
R82 "R0603" R0603 5000,2937.5 r270 top
R83 "R0603" R0603 512.5,2850 r180 top
R84 "R0603" R0603 637.5,2850 r180 top
R85 "R0603" R0603 3312.5,2825 r180 top
R86 "R0603" R0603 3312.5,2662.5 r180 top
R87 "R0603" R0603 700,2612.5 r270 top
R88 "R0603" R0603 1100,2600 r0 top
R89 "R0603" R0603 700,2425 r270 top
R90 "R0603" R0603 1100,2412.5 r0 top
R91 "R0603" R0603 1100,2237 r0 top
R92 "R0603" R0603 1100,2162 r0 top
R93 "R0603" R0603 1100,2087 r0 top
R94 "R0603" R0603 1100,2012 r0 top
R95 "R0603" R0603 528,1856 r180 top
R96 "R0603" R0603 2264,7488 r270 bottom
R97 "R0603" R0603 4325,6912.5 r270 bottom
R98 "R0603" R0603 4462.5,6887.5 r0 bottom
R99 "R0603" R0603 5850,6912.5 r270 bottom
R100 "R0603" R0603 4500,6537.5 r180 bottom
R101 "R0603" R0603 6662.5,4975 r180 bottom
R102 "R0603" R0603 6662.5,4875 r180 bottom
R103 "R0603" R0603 6662.5,4675 r180 bottom
R104 "R0603" R0603 6662.5,4575 r180 bottom
R105 "R0603" R0603 725,4337.5 r180 bottom
R106 "R0603" R0603 725,4262.5 r180 bottom
R107 "R0603" R0603 987.5,4150 r270 bottom
R108 "R0603" R0603 1499.5,4137 r0 bottom
R109 "R0603" R0603 3950,3837.5 r90 bottom
R110 "R0603" R0603 4212.5,3550 r180 bottom
R111 "R0603" R0603 4212.5,3450 r180 bottom
R112 "R0603" R0603 3575,3000 r0 bottom
R113 "R0603" R0603 3312.5,2750 r180 bottom
R114 "R0603" R0603 3762.5,2762.5 r0 bottom
R115 "R0603" R0603 4475,2812.5 r270 bottom
R116 "R0603" R0603 3512.5,2675 r270 bottom
R117 "R0603" R0603 4050,2500 r270 bottom
R118 "R0603" R0603 6787.5,1900 r0 bottom
R119 "R0603" R0603 6775,1300 r0 bottom
R120 "R0603" R0603 1424,1240 r0 bottom
R121 "R0603" R0603 525,975 r180 bottom
R122 "R0603" R0603 850,1012.5 r270 bottom
R123 "R0603" R0603 525,887.5 r180 bottom
RB1 "R0603" R0603 7312.5,3062.5 r0 top
RB2 "R0603" R0603 7312.5,3137.5 r0 top
RB3 "R0603" R0603 7312.5,3212.5 r0 top
RB4 "R0603" R0603 7312.5,3287.5 r0 top
RB5 "R0603" R0603 9600,2600 r0 top
RB6 "R0603" R0603 9600,2675 r0 top
RB7 "R0603" R0603 9600,2450 r0 top
RB8 "R0603" R0603 9600,2525 r0 top
RB9 "R0603" R0603 9600,2300 r0 top
RB10 "R0603" R0603 9600,2375 r0 top
RB11 "R0603" R0603 9600,2150 r0 top
RB12 "R0603" R0603 9600,2225 r0 top
RB13 "R0603" R0603 9600,2075 r0 top
RB14 "R0603" R0603 9600,2000 r0 top
RB15 "R0603" R0603 9600,1925 r0 top
RB16 "R0603" R0603 9600,1850 r0 top
RB17 "R0603" R0603 9600,1775 r0 top
RB18 "R0603" R0603 9600,1700 r0 top
RB19 "R0603" R0603 9600,1625 r0 top
RB20 "R0603" R0603 9600,1550 r0 top
RB21 "R0603" R0603 9600,1475 r0 top
RB22 "R0603" R0603 9600,1400 r0 top
RB23 "R0603" R0603 9600,1325 r0 top
RB24 "R0603" R0603 9600,1250 r0 top
RB25 "R0603" R0603 9600,1175 r0 top
RB26 "R0603" R0603 9600,1100 r0 top
RB27 "R0603" R0603 9600,1025 r0 top
RB28 "R0603" R0603 9600,950 r0 top
RB29 "R0603" R0603 9600,875 r0 top
RB30 "R0603" R0603 9600,800 r0 top
RB31 "R0603" R0603 9600,725 r0 top
RB32 "R0603" R0603 9600,650 r0 top
RB33 "R0603" R0603 9600,575 r0 top
RB34 "R0603" R0603 9600,500 r0 top
RB35 "R0603" R0603 9600,425 r0 top
RB36 "R0603" R0603 9600,350 r0 top
RG1 "R0603" R0603 3312.5,3425 r180 bottom
RG2 "R0603" R0603 4737.5,2700 r180 bottom
RG3 "R0603" R0603 4737.5,2625 r180 bottom
RL1 "R0603" R0603 7962.5,2887.5 r0 top
RL2 "R0603" R0603 7962.5,2962.5 r0 top
RL3 "R0603" R0603 7962.5,3037.5 r0 top
RL4 "R0603" R0603 7962.5,3112.5 r0 top
RL5 "R0603" R0603 7962.5,3187.5 r0 top
RL6 "R0603" R0603 7962.5,3262.5 r0 top
RL7 "R0603" R0603 7962.5,3337.5 r0 top
RL8 "R0603" R0603 7962.5,3412.5 r0 top
RL9 "R0603" R0603 7962.5,3487.5 r0 top
RL10 "R0603" R0603 7962.5,3562.5 r0 top
RL11 "R0603" R0603 7962.5,3637.5 r0 top
RL12 "R0603" R0603 7962.5,3712.5 r0 top
RL13 "R0603" R0603 7962.5,3787.5 r0 top
RL14 "R0603" R0603 7962.5,3862.5 r0 top
RL15 "R0603" R0603 7962.5,3937.5 r0 top
RL16 "R0603" R0603 7962.5,4012.5 r0 top
RL17 "R0603" R0603 7962.5,4987.5 r0 top
RL18 "R0603" R0603 7962.5,5062.5 r0 top
RL19 "R0603" R0603 7962.5,4762.5 r0 top
RL20 "R0603" R0603 7962.5,4687.5 r0 top
RL21 "R0603" R0603 7962.5,4912.5 r0 top
RL22 "R0603" R0603 7962.5,4837.5 r0 top
RL23 "R0603" R0603 7962.5,4162.5 r0 top
RL24 "R0603" R0603 7962.5,4087.5 r0 top
RL25 "R0603" R0603 7962.5,4312.5 r0 top
RL26 "R0603" R0603 7962.5,4237.5 r0 top
RL27 "R0603" R0603 7962.5,4462.5 r0 top
RL28 "R0603" R0603 7962.5,4387.5 r0 top
RL29 "R0603" R0603 7962.5,4612.5 r0 top
RL30 "R0603" R0603 7962.5,4537.5 r0 top
RN1 "8P4RA" 8P4RA 5475,6300 r90 top
RN2 "8P4RA" 8P4RA 7968,7032 r0 bottom
RN3 "8P4RA" 8P4RA 3824,6886.5 r180 bottom
RN4 "8P4RA" 8P4RA 7624,6896 r90 bottom
RN5 "8P4RA" 8P4RA 7750,6275 r0 bottom
RN6 "8P4RA" 8P4RA 7950,6275 r0 bottom
RN7 "8P4RA" 8P4RA 6537.5,6212.5 r0 bottom
RN8 "8P4RA" 8P4RA 6750,2087.5 r90 bottom
RN9 "8P4RA" 8P4RA 6750,1475 r90 bottom
RS1 "R0603" R0603 9675,3537.5 r0 top
RS2 "R0603" R0603 9675,4362.5 r0 top
RS3 "R0603" R0603 9675,4437.5 r0 top
RS4 "R0603" R0603 9675,3612.5 r0 top
RS5 "R0603" R0603 9675,3687.5 r0 top
RS6 "R0603" R0603 9675,3462.5 r0 top
RS7 "R0603" R0603 9675,4287.5 r0 top
RS8 "R0603" R0603 9675,4212.5 r0 top
RS9 "R0603" R0603 9675,4137.5 r0 top
RS10 "R0603" R0603 9675,4062.5 r0 top
RS11 "R0603" R0603 9675,3987.5 r0 top
RS12 "R0603" R0603 9675,3912.5 r0 top
RS13 "R0603" R0603 9675,3837.5 r0 top
RS14 "R0603" R0603 9675,3762.5 r0 top
RS15 "R0603" R0603 9675,3387.5 r0 top
RS16 "R0603" R0603 9675,3312.5 r0 top
RV1 "R0603" R0603 8025,6975 r180 top
RX1 "R0603" R0603 3945.5,5950.5 r270 top
RX2 "R0603" R0603 3870.5,5950.5 r90 top
RX3 "R0603" R0603 1012.5,5825 r270 top
RX4 "R0603" R0603 1237.5,5825 r270 top
SW2 "SW4-SMD" SW4-SMD 2225,7425 r270 top
SW3 "SWDIP-5-2.54X7.62M" SWDIP-5-2.54X7.62M 7187.5,7337.5 r270 top
SW4 "SW4-SMD" SW4-SMD 2225,7062.5 r90 top
SW5 "PAD3P" PAD3P 7762.5,6925 r0 top
SW6 "SWDIP-5-2.54X7.62M" SWDIP-5-2.54X7.62M 3599,6774 r0 top
SW7 "SWDIP-5-2.54X7.62M" SWDIP-5-2.54X7.62M 7187.5,6700 r270 top
SW8 "SWDIP-6-2.54X7.62M" SWDIP-6-2.54X7.62M 8372.5,6711 r270 top
SW9 "PAD2P" PAD2P 1500,6575 r270 top
SW10 "PAD2P" PAD2P 2300,6537.5 r270 top
SW11 "SWDIP-6-2.54X7.62M" SWDIP-6-2.54X7.62M 5312.5,6187.5 r270 top
SW12 "PAD2P" PAD2P 1662.5,6175 r270 top
SW13 "SWDIP-5-2.54X7.62M" SWDIP-5-2.54X7.62M 7187.5,6100 r270 top
SW14 "SWDIP-8-2.54X7.62M" SWDIP-8-2.54X7.62M 6762.5,6000 r180 top
SW15 "SWDIP-8-2.54X7.62M" SWDIP-8-2.54X7.62M 2050,5837.5 r270 top
SW16 "SIP-3P-2.54M" SIP-3P-2.54M 4195.5,5913 r270 top
SW17 "SWDIP-4-2.54X7.62M" SWDIP-4-2.54X7.62M 5512.5,5400 r270 top
SW18 "SWDIP-4-2.54X7.62M" SWDIP-4-2.54X7.62M 4687.5,5162.5 r270 top
SW19 "SWDIP-6-2.54X7.62M" SWDIP-6-2.54X7.62M 6487.5,5075 r270 top
SW21 "SWDIP-5-2.54X7.62M" SWDIP-5-2.54X7.62M 1962,4774.5 r180 top
SW26 "SWDIP-5-2.54X7.62M" SWDIP-5-2.54X7.62M 8897.64,3464.57 r270 top
SW30 "SWDIP-4-2.54X7.62M" SWDIP-4-2.54X7.62M 1600,2374.5 r90 top
SW31 "SWDIP-5-2.54X7.62M" SWDIP-5-2.54X7.62M 6350,2300 r270 top
SW34 "SWDIP-4-2.54X7.62M" SWDIP-4-2.54X7.62M 1600,1887 r90 top
SW35 "SWDIP-5-2.54X7.62M" SWDIP-5-2.54X7.62M 6350,1700 r270 top
SW37 "SWDIP-5-2.54X7.62M" SWDIP-5-2.54X7.62M 1600,1240 r90 top
SW38 "SWDIP-5-2.54X7.62M" SWDIP-5-2.54X7.62M 2128,1240 r90 top
SW40 "SWDIP-4-2.54X7.62M" SWDIP-4-2.54X7.62M 2128,648 r90 top
SW41 "SWDIP-4-2.54X7.62M" SWDIP-4-2.54X7.62M 3437.5,637.5 r90 top
SW42 "SWDIP-4-2.54X7.62M" SWDIP-4-2.54X7.62M 4600,625 r90 top
SW43 "SWDIP-4-2.54X7.62M" SWDIP-4-2.54X7.62M 6812.5,650 r90 top
SW44 "SWDIP-4-2.54X7.62M" SWDIP-4-2.54X7.62M 7937.5,650 r90 top
U1 "TDFN2X2-8" TDFN2X2-8 925,7250 r0 top
U3 "TSOT-25" TSOT-25 1200,6525 r0 top
U4 "TSOT-25" TSOT-25 1987.5,6487.5 r0 top
U6 "SOIC-8P_208MIL" SOIC-8P_208MIL 9035,6436 r180 top
U7 "SOP16$2F$10.4$2F$1.27" SOP16$2F$10.4$2F$1.27 8847.5,6248.5 r0 top
U8 "TSOT-25" TSOT-25 1350,6137.5 r0 top
U9 "SOP48-0.5MM" SOP48-0.5MM 7700,5987.5 r90 top
U10 "QFN32$2F$5X5$2F$0.5" QFN32$2F$5X5$2F$0.5 1250,5512.5 r180 top
U11 "SO-8-1.27X5.4M" SO-8-1.27X5.4M 6012.5,5475 r270 top
U12 "SO-8-1.27X5.4M" SO-8-1.27X5.4M 6012.5,5212.5 r270 top
U13 "TS6121C" TS6121C 1150,4237.5 r90 top
U14 "QFN32P-0.4X4M" QFN32P-0.4X4M 1749.5,4049.5 r90 top
U15 "P216QFP" P216QFP 4087.5,3125 r0 top
U16 "SOP8$2F$4.9$2F$0.65" SOP8$2F$4.9$2F$0.65 687.5,2213 r270 top
U17 "SOP8$2F$4.9$2F$0.65" SOP8$2F$4.9$2F$0.65 687.5,2025.5 r270 top
U18 "SOP16$2F$150" SOP16$2F$150 1350,800 r270 top
U19 "SOP16$2F$150" SOP16$2F$150 2812.5,812.5 r270 top
U20 "SOP16$2F$150" SOP16$2F$150 3837.5,812.5 r270 top
U21 "SOP16$2F$150" SOP16$2F$150 6225,812.5 r270 top
U22 "SOP16$2F$150" SOP16$2F$150 7337.5,825 r270 top
UX1 "SOT23-5" SOT23-5 4012.5,6187.5 r180 top
X1 "SOT-143" SOT-143 1775,3612.5 r270 top
X2 "XRGBBCNANF-27MHZ" XRGBBCNANF-27MHZ 3125,3275 r180 top
X3 "TXC-9H_T9" TXC-9H_T9 5087.5,2987.5 r0 top

## Footprints (in the part's own frame and the unit in brackets; to place one, negate y for a bottom-side part, rotate by r counter-clockwise, add the part's x,y. Pads: shape width x height; smd on the part's side, far side on the other; paste and mask are expansions set on the pad)
1PAD_1.25X1.25MM [mm]
  rect 1.25x1.25 smd: \(0,0)
8P4RA [mil]
  oval 20x55 smd: 1(96,0) 2(96,82) 3(64,0) 4(64,82) 5(32,0) 6(32,82) 7(0,0) 8(0,82)
  silkscreen extent -15,31 111,51
9.7D2.54MM [mil]
  rect 50x50 / inner round 50 / far side rect 50x50 hole 32 mask+4: 1(-50,0)
  round 50 hole 32 mask+4: 2(50,0)
  silkscreen extent -123,-73 113,163
AXA2R63061 [mm]
  rect 1x2.1 smd: 1(-6.875,1.05) 2(-4.375,1.05) 3(-1.875,1.05) 4(0.625,1.05) 5(3.125,1.05) 6(5.625,1.05) 7(8.125,1.05) 8(9.775,1.05) 9(-9.375,1.05)
  rect 2.2x1.2 smd: 10(13.63,-10.5)
  rect 2.2x1.1 smd: 11(13.73,-19.3) 12(13.85,-20.6)
  oval 1.6x3.3 / inner oval 1.016x3.429 / far side oval 1.016x3.429 hole 0.45 slot 1.65 at 90 deg: 13(-14.55,-23.4) 14(13.4,-23.4)
  silkscreen extent -14.08,-28.4 14.08,0
BAT$5C$CR2032-4-2 [mil]
  rect 70x70 / inner round 70 / far side rect 70x70 hole 40: 1(393.7,0)
  round 70 hole 40: 2(-393.7,0)
  silkscreen extent -525,-455 612,455
C0603 [mil]
  rect 30x40 smd: 1(-30,0) 2(30,0)
  silkscreen extent -55,-30 55,30
CK05 [mil]
  round 60 hole 35: 1(-100,0) 2(100,0)
  silkscreen extent -50,-50 50,50
CON$2F$5X2B$2F$2.54$2F$M [mil]
  rect 60x60 / inner round 60 / far side rect 60x60 hole 37: 1(0,0)
  round 60 hole 37: 2(0,100) 3(100,0) 4(100,100) 5(200,0) 6(200,100) 7(300,0) 8(300,100) 9(400,0) 10(400,100)
  silkscreen extent -50,-75 450,200
DB9FM-L [mil]
  rect 70x70 / inner round 70 / far side rect 70x70 hole 37: 1(432,0)
  round 70 hole 37: 2(324,0) 3(216,0) 4(108,0) 5(0,0) 6(378,-114) 7(270,-114) 8(162,-114) 9(54,-114)
  round 177 hole 120: 10(-284,-57) 11(716,-57)
  silkscreen extent -402,-638 834,71
DIDEO_A [mil]
  rect 23x27 smd: 1(0,0) 2(67,0)
  silkscreen extent 25,-10 40,10
H-250 [mil]
  round 250 / inner round 200 / far side round 250 hole 125: 1(0,0)
  round 40 hole 16: 2(-100,0) 3(100,0) 4(0,100) 5(0,-100) 6(-65,-75) 7(70,-70) 8(-70,75) 9(75,70)
HEAD20X2-2.54M [mil]
  rect 60x60 hole 37: 1(0,0)
  round 60 hole 37: 2(0,100) 3(100,0) 4(100,100) 5(200,0) 6(200,100) 7(300,0) 8(300,100) 9(400,0) 10(400,100) 11(500,0) 12(500,100) 13(600,0) 14(600,100) 15(700,0) 16(700,100) 17(800,0) 18(800,100) 19(900,0) 20(900,100) 21(1000,0) 22(1000,100) 23(1100,0) 24(1100,100) 25(1200,0) 26(1200,100) 27(1300,0) 28(1300,100) 29(1400,0) 30(1400,100) 31(1500,0) 32(1500,100) 33(1600,0) 34(1600,100) 35(1700,0) 36(1700,100) 37(1800,0) 38(1800,100) 39(1900,0) 40(1900,100)
  silkscreen extent -50,-50 1950,150
HEADER2X2 [mil]
  rect 60x60 / inner round 60 / far side rect 60x60 hole 37: 1(0,0)
  round 60 hole 37: 2(0,100) 3(100,0) 4(100,100)
  silkscreen extent -50,-50 150,150
HEADER2X4 [mil]
  rect 60x60 / inner round 60 / far side rect 60x60 hole 40: 1(0,0)
  round 60 hole 40: 2(0,100) 3(100,0) 4(100,100) 5(200,0) 6(200,100) 7(300,0) 8(300,100)
  silkscreen extent -50,-50 350,150
HEADER8X2$5C$2.54 [mil]
  rect 55x55 / inner round 55 / far side rect 55x55 hole 37: 1(0,0)
  round 55 hole 37: 2(0,100) 3(100,0) 4(100,100) 5(200,0) 6(200,100) 7(300,0) 8(300,100) 9(400,0) 10(400,100) 11(500,0) 12(500,100) 13(600,0) 14(600,100) 15(700,0) 16(700,100)
  silkscreen extent -50,-50 750,150
HEADER10X2$5C$2.54 [mil]
  rect 60x60 / inner round 60 / far side rect 60x60 hole 37: 1(0,0)
  round 60 hole 37: 2(0,100) 3(100,0) 4(100,100) 5(200,0) 6(200,100) 7(300,0) 8(300,100) 9(400,0) 10(400,100) 11(500,0) 12(500,100) 13(600,0) 14(600,100) 15(700,0) 16(700,100) 17(800,0) 18(800,100) 19(900,0) 20(900,100)
  silkscreen extent -50,-50 950,150
HEADER10X2$5C$BOX [mil]
  rect 60x60 / inner round 60 / far side rect 60x60 hole 35: 1(0,0)
  round 60 hole 35: 2(0,-100) 3(-100,0) 4(-100,-100) 5(-200,0) 6(-200,-100) 7(-300,0) 8(-300,-100) 9(-400,0) 10(-400,-100) 11(-500,0) 12(-500,-100) 13(-600,0) 14(-600,-100) 15(-700,0) 16(-700,-100) 17(-800,0) 18(-800,-100) 19(-900,0) 20(-900,-100)
  silkscreen extent -1075,-225 175,125
HEADER12X2-2.54M [mil]
  rect 60x60 / inner round 60 / far side rect 60x60 hole 40: 1(0,0)
  round 60 hole 40: 2(0,100) 3(100,0) 4(100,100) 5(200,0) 6(200,100) 7(300,0) 8(300,100) 9(400,0) 10(400,100) 11(500,0) 12(500,100) 13(600,0) 14(600,100) 15(700,0) 16(700,100) 17(800,0) 18(800,100) 19(900,0) 20(900,100) 21(1000,0) 22(1000,100) 23(1100,0) 24(1100,100)
  silkscreen extent -50,-50 1150,150
HEADER_2X3_2.54MM [mil]
  rect 60x60 / inner round 60 / far side rect 60x60 hole 40: 1(0,0)
  round 60 hole 40: 2(0,100) 3(100,0) 4(100,100) 5(200,0) 6(200,100)
  silkscreen extent -50,-50 250,150
HEADER_2X6_2.54MM [mil]
  rect 60x60 / inner round 60 / far side rect 60x60 hole 37: 1(0,0)
  round 60 hole 37: 2(0,100) 3(100,0) 4(100,100) 5(200,0) 6(200,100) 7(300,0) 8(300,100) 9(400,0) 10(400,100) 11(500,0) 12(500,100)
  silkscreen extent -50,-50 550,150
JACK$5C$PJK-691 [mm]
  rect 1.4x2.5 smd: 1(4,-3.45) 2(7,-3.45) 3(9.85,-3.45) 4(10,3.45) 5(12.1,-3.45) 6(7.75,3.45) 7(4.9,3.45) 8(3.1,3.45)
  round 1.25 hole 1.25 unplated: 9(3.5,0) 10(10.5,0)
  silkscreen extent -5,-4 14.5,4
L0603 [mil]
  rect 40x30 smd: 1(-30,0) 2(30,0)
  silkscreen extent -60,-25 60,25
LED_0603 [mil]
  rect 30x40 smd: 1(-30,0) 2(30,0)
  silkscreen extent -55,-30 55,30
M_DIN_32X2$2F$2.54A [mil]
  round 60 hole 40: 1(-1550,-50) 2(-1550,50) 3(-1450,-50) 4(-1450,50) 5(-1350,-50) 6(-1350,50) 7(-1250,-50) 8(-1250,50) 9(-1150,-50) 10(-1150,50) 11(-1050,-50) 12(-1050,50) 13(-950,-50) 14(-950,50) 15(-850,-50) 16(-850,50) 17(-750,-50) 18(-750,50) 19(-650,-50) 20(-650,50) 21(-550,-50) 22(-550,50) 23(-450,-50) 24(-450,50) 25(-350,-50) 26(-350,50) 27(-250,-50) 28(-250,50) 29(-150,-50) 30(-150,50) 31(-50,-50) 32(-50,50) 33(50,-50) 34(50,50) 35(150,-50) 36(150,50) 37(250,-50) 38(250,50) 39(350,-50) 40(350,50) 41(450,-50) 42(450,50) 43(550,-50) 44(550,50) 45(650,-50) 46(650,50) 47(750,-50) 48(750,50) 49(850,-50) 50(850,50) 51(950,-50) 52(950,50) 53(1050,-50) 54(1050,50) 55(1150,-50) 56(1150,50) 57(1250,-50) 58(1250,50) 59(1350,-50) 60(1350,50) 61(1450,-50) 62(1450,50) 63(1550,-50) 64(1550,50)
  round 150 hole 115: 65(-1771.65,61.81) 66(1771.65,61.81)
  silkscreen extent -1870,-165 1870,165
MINI_5P_B_TYPE [mm]
  rect 0.5x3.1 smd: 1(-2.85,-0.31) 2(-3.65,-0.31) 3(-4.45,-0.31) 4(-5.25,-0.31) 5(-6.05,-0.31)
  rect 2x2.5 smd: 6(-8.9,4.72) 8(0,4.74)
  rect 2x2.794 smd: 7(-8.89,-0.01) 9(0,0)
  round 0.813 hole 0.813 unplated: 10(-6.65,2.29) 11(-2.25,2.29)
  silkscreen extent -7.45,-3.09 -1.45,7.49
P216QFP [mil]
  oval 8x80 smd: 1(-417.32,-511.81) 2(-401.57,-511.81) 3(-385.83,-511.81) 4(-370.08,-511.81) 5(-354.33,-511.81) 6(-338.58,-511.81) 7(-322.83,-511.81) 8(-307.09,-511.81) 9(-291.34,-511.81) 10(-275.59,-511.81) 11(-259.84,-511.81) 12(-244.09,-511.81) 13(-228.35,-511.81) 14(-212.6,-511.81) 15(-196.85,-511.81) 16(-181.1,-511.81) 17(-165.35,-511.81) 18(-149.61,-511.81) 19(-133.86,-511.81) 20(-118.11,-511.81) 21(-102.36,-511.81) 22(-86.61,-511.81) 23(-70.87,-511.81) 24(-55.12,-511.81) 25(-39.37,-511.81) 26(-23.62,-511.81) 27(-7.87,-511.81) 28(7.87,-511.81) 29(23.62,-511.81) 30(39.37,-511.81) 31(55.12,-511.81) 32(70.87,-511.81) 33(86.61,-511.81) 34(102.36,-511.81) 35(118.11,-511.81) 36(133.86,-511.81) 37(149.61,-511.81) 38(165.35,-511.81) 39(181.1,-511.81) 40(196.85,-511.81) 41(212.6,-511.81) 42(228.35,-511.81) 43(244.09,-511.81) 44(259.84,-511.81) 45(275.59,-511.81) 46(291.34,-511.81) 47(307.09,-511.81) 48(322.83,-511.81) 49(338.58,-511.81) 50(354.33,-511.81) 51(370.08,-511.81) 52(385.83,-511.81) 53(401.57,-511.81) 54(417.32,-511.81) 109(417.32,511.81) 110(401.57,511.81) 111(385.83,511.81) 112(370.08,511.81) 113(354.33,511.81) 114(338.58,511.81) 115(322.83,511.81) 116(307.09,511.81) 117(291.34,511.81) 118(275.59,511.81) 119(259.84,511.81) 120(244.09,511.81) 121(228.35,511.81) 122(212.6,511.81) 123(196.85,511.81) 124(181.1,511.81) 125(165.35,511.81) 126(149.61,511.81) 127(133.86,511.81) 128(118.11,511.81) 129(102.36,511.81) 130(86.61,511.81) 131(70.87,511.81) 132(55.12,511.81) 133(39.37,511.81) 134(23.62,511.81) 135(7.87,511.81) 136(-7.87,511.81) 137(-23.62,511.81) 138(-39.37,511.81) 139(-55.12,511.81) 140(-70.87,511.81) 141(-86.61,511.81) 142(-102.36,511.81) 143(-118.11,511.81) 144(-133.86,511.81) 145(-149.61,511.81) 146(-165.35,511.81) 147(-181.1,511.81) 148(-196.85,511.81) 149(-212.6,511.81) 150(-228.35,511.81) 151(-244.09,511.81) 152(-259.84,511.81) 153(-275.59,511.81) 154(-291.34,511.81) 155(-307.09,511.81) 156(-322.83,511.81) 157(-338.58,511.81) 158(-354.33,511.81) 159(-370.08,511.81) 160(-385.83,511.81) 161(-401.57,511.81) 162(-417.32,511.81)
  oval 80x8 smd: 55(511.81,-417.32) 56(511.81,-401.57) 57(511.81,-385.83) 58(511.81,-370.08) 59(511.81,-354.33) 60(511.81,-338.58) 61(511.81,-322.83) 62(511.81,-307.09) 63(511.81,-291.34) 64(511.81,-275.59) 65(511.81,-259.84) 66(511.81,-244.09) 67(511.81,-228.35) 68(511.81,-212.6) 69(511.81,-196.85) 70(511.81,-181.1) 71(511.81,-165.35) 72(511.81,-149.61) 73(511.81,-133.86) 74(511.81,-118.11) 75(511.81,-102.36) 76(511.81,-86.61) 77(511.81,-70.87) 78(511.81,-55.12) 79(511.81,-39.37) 80(511.81,-23.62) 81(511.81,-7.87) 82(511.81,7.87) 83(511.81,23.62) 84(511.81,39.37) 85(511.81,55.12) 86(511.81,70.87) 87(511.81,86.61) 88(511.81,102.36) 89(511.81,118.11) 90(511.81,133.86) 91(511.81,149.61) 92(511.81,165.35) 93(511.81,181.1) 94(511.81,196.85) 95(511.81,212.6) 96(511.81,228.35) 97(511.81,244.09) 98(511.81,259.84) 99(511.81,275.59) 100(511.81,291.34) 101(511.81,307.09) 102(511.81,322.83) 103(511.81,338.58) 104(511.81,354.33) 105(511.81,370.08) 106(511.81,385.83) 107(511.81,401.57) 108(511.81,417.32) 163(-511.81,417.32) 164(-511.81,401.57) 165(-511.81,385.83) 166(-511.81,370.08) 167(-511.81,354.33) 168(-511.81,338.58) 169(-511.81,322.83) 170(-511.81,307.09) 171(-511.81,291.34) 172(-511.81,275.59) 173(-511.81,259.84) 174(-511.81,244.09) 175(-511.81,228.35) 176(-511.81,212.6) 177(-511.81,196.85) 178(-511.81,181.1) 179(-511.81,165.35) 180(-511.81,149.61) 181(-511.81,133.86) 182(-511.81,118.11) 183(-511.81,102.36) 184(-511.81,86.61) 185(-511.81,70.87) 186(-511.81,55.12) 187(-511.81,39.37) 188(-511.81,23.62) 189(-511.81,7.87) 190(-511.81,-7.87) 191(-511.81,-23.62) 192(-511.81,-39.37) 193(-511.81,-55.12) 194(-511.81,-70.87) 195(-511.81,-86.61) 196(-511.81,-102.36) 197(-511.81,-118.11) 198(-511.81,-133.86) 199(-511.81,-149.61) 200(-511.81,-165.35) 201(-511.81,-181.1) 202(-511.81,-196.85) 203(-511.81,-212.6) 204(-511.81,-228.35) 205(-511.81,-244.09) 206(-511.81,-259.84) 207(-511.81,-275.59) 208(-511.81,-291.34) 209(-511.81,-307.09) 210(-511.81,-322.83) 211(-511.81,-338.58) 212(-511.81,-354.33) 213(-511.81,-370.08) 214(-511.81,-385.83) 215(-511.81,-401.57) 216(-511.81,-417.32)
  silkscreen extent -607,-607 607,607
PAD2P [mil]
  rect 30x40 smd: 1(0,0) 2(45,0)
  silkscreen extent -30,-5 -22,13
PAD3P [mil]
  rect 30x40 smd: 1(0,0) 2(45,0) 3(90,0)
POWRJACK$5C$3P [mm]
  oval 4.8x1.8 hole 0.8 slot 3.9 at 0 deg: 1(0,-6.25) 2(0,0)
  oval 1.8x4.8 hole 0.8 slot 3.9 at 90 deg: 3(-5,-3.25)
  silkscreen extent -5.1,-6.25 4.83,7.75
QFN32$2F$5X5$2F$0.5 [mm]
  oval 1.2x0.3 smd: 1(-2.6,1.75) 2(-2.6,1.25) 3(-2.6,0.75) 4(-2.6,0.25) 5(-2.6,-0.25) 6(-2.6,-0.75) 7(-2.6,-1.25) 8(-2.6,-1.75) 17(2.6,-1.75) 18(2.6,-1.25) 19(2.6,-0.75) 20(2.6,-0.25) 21(2.6,0.25) 22(2.6,0.75) 23(2.6,1.25) 24(2.6,1.75)
  oval 0.3x1.2 smd: 9(-1.75,-2.6) 10(-1.25,-2.6) 11(-0.75,-2.6) 12(-0.25,-2.6) 13(0.25,-2.6) 14(0.75,-2.6) 15(1.25,-2.6) 16(1.75,-2.6) 25(1.75,2.6) 26(1.25,2.6) 27(0.75,2.6) 28(0.25,2.6) 29(-0.25,2.6) 30(-0.75,2.6) 31(-1.25,2.6) 32(-1.75,2.6)
  round 0.457 hole 0.305: 33(-1.1,1.1) 34(0,1.1) 35(1.1,1.1) 36(1.1,0) 37(0,0) 38(-1.1,0) 39(-1.1,-1.1) 40(0,-1.1) 41(1.1,-1.1)
  Top region: -1.7,1.7 1.7,1.7 1.7,-1.7 -1.7,-1.7 -1.7,1.7
  silkscreen extent -3.81,-2.54 2.54,2.54
QFN32P-0.4X4M [mil]
  oval 30x8 smd: 1(-78.74,55.12) 2(-78.74,39.37) 3(-78.74,23.62) 4(-78.74,7.87) 5(-78.74,-7.87) 6(-78.74,-23.62) 7(-78.74,-39.37) 8(-78.74,-55.12) 17(78.74,-55.12) 18(78.74,-39.37) 19(78.74,-23.62) 20(78.74,-7.87) 21(78.74,7.87) 22(78.74,23.62) 23(78.74,39.37) 24(78.74,55.12)
  oval 8x30 smd: 9(-55.12,-78.74) 10(-39.37,-78.74) 11(-23.62,-78.74) 12(-7.87,-78.74) 13(7.87,-78.74) 14(23.62,-78.74) 15(39.37,-78.74) 16(55.12,-78.74) 25(55.12,78.74) 26(39.37,78.74) 27(23.62,78.74) 28(7.87,78.74) 29(-7.87,78.74) 30(-23.62,78.74) 31(-39.37,78.74) 32(-55.12,78.74)
  rect 107x107 / inner round 0 / far side rect 107x107 all layers, no hole: 33(0,0)
  silkscreen extent -79,-79 79,79
R0603 [mil]
  rect 30x40 smd: 1(-30,0) 2(30,0)
  silkscreen extent -55,-30 55,30
RJ45-8P8C$2F$LED [mm]
  rect 1.397x1.397 / inner round 1.397 / far side rect 1.397x1.397 hole 0.94: 1(3.57,2.54)
  round 1.397 hole 0.94: 2(2.55,4.32) 3(1.53,2.54) 4(0.51,4.32) 5(-0.51,2.54) 6(-1.53,4.32) 7(-2.55,2.54) 8(-3.57,4.32)
  round 1.524 hole 1.02: 9(6.86,9.13) 10(4.57,9.13) 11(-4.57,9.13) 12(-6.86,9.13)
  round 2.54 hole 1.8: 13(8.2,3.56) 14(-8.2,3.56)
  round 3.2 hole 3.2 unplated: 15(6.35,0) 16(-6.35,0)
  silkscreen extent -8.21,-5.34 8.21,10.3
SIM-CARD [mm]
  rect 2x1.2 smd: 1(25.22,3.81) 2(25.22,1.27) 3(25.22,-1.27) 4(25.22,-3.81) 5(0,3.81) 6(0,1.27) 7(0,-1.27) 8(0,-3.81)
  round 1.75 hole 1.75: 9(4.71,6)
  round 1.3 hole 1.3: 10(20.51,-6)
  silkscreen extent -3.48,-8.6 26.5,8.6
SIP$5C$2P-2.54M [mil]
  rect 60x60 / inner round 60 / far side rect 60x60 hole 35: 1(0,0)
  round 60 hole 35: 2(100,0)
  silkscreen extent -112,-50 150,50
SIP-3P-2.54M [mil]
  rect 60x60 / inner round 60 / far side rect 60x60 hole 37: 1(0,0)
  round 60 hole 37: 2(100,0) 3(200,0)
  silkscreen extent -112,-50 250,50
SMTDR43 [mm]
  rect 3.115x1.6 smd: 1(0,1.2) 2(0,-1.2)
  Top pour cut-out: -1.778,2.032 -1.778,-2.032 1.778,-2.032 1.778,2.032 -1.778,2.032
  silkscreen extent -1.75,-0.25 1.75,0.25
SO-8-1.27X5.4M [mm]
  rect 0.635x1.5 smd: 1(0,0) 2(1.27,0) 3(2.54,0) 4(3.81,0) 5(3.81,5.4) 6(2.54,5.4) 7(1.27,5.4) 8(0,5.4)
  silkscreen extent -0.51,-1.56 4.32,4.19
SOIC-8P_208MIL [mil]
  rect 60x20 smd: 1(-159.5,75) 2(-159.5,25) 3(-159.5,-25) 4(-159.5,-75) 5(159.5,-75) 6(159.5,-25) 7(159.5,25) 8(159.5,75)
  silkscreen extent -110,-100 110,100
SOP8$2F$4.9$2F$0.65 [mil]
  oval 15x50 smd: 1(0,0) 2(25.59,0) 3(51.18,0) 4(76.77,0) 5(76.77,182.24) 6(51.18,182.24) 7(25.59,182.24) 8(0,182.24)
  silkscreen extent -25,-58 98,142
SOP16$2F$10.4$2F$1.27 [mm]
  oval 0.6x2 smd: 1(0,0) 2(1.27,0) 3(2.54,0) 4(3.81,0) 5(5.08,0) 6(6.35,0) 7(7.62,0) 8(8.89,0) 9(8.89,9.5) 10(7.62,9.5) 11(6.35,9.5) 12(5.08,9.5) 13(3.81,9.5) 14(2.54,9.5) 15(1.27,9.5) 16(0,9.5)
  silkscreen extent -0.64,-1.91 9.53,11.95
SOP16$2F$150 [mil]
  rect 25x80 smd: 1(-175,-100) 2(-125,-100) 3(-75,-100) 4(-25,-100) 5(25,-100) 6(75,-100) 7(125,-100) 8(175,-100) 9(175,100) 10(125,100) 11(75,100) 12(25,100) 13(-25,100) 14(-75,100) 15(-125,100) 16(-175,100)
  silkscreen extent -200,-50 200,50
SOP48-0.5MM [mm]
  oval 1x0.25 smd: 1(0.2,0) 2(0.2,-0.5) 3(0.2,-1) 4(0.2,-1.5) 5(0.2,-2) 6(0.2,-2.5) 7(0.2,-3) 8(0.2,-3.5) 9(0.2,-4) 10(0.2,-4.5) 11(0.2,-5) 12(0.2,-5.5) 13(0.2,-6) 14(0.2,-6.5) 15(0.2,-7) 16(0.2,-7.5) 17(0.2,-8) 18(0.2,-8.5) 19(0.2,-9) 20(0.2,-9.5) 21(0.2,-10) 22(0.2,-10.5) 23(0.2,-11) 24(0.2,-11.5) 25(20.45,-11.5) 26(20.45,-11) 27(20.45,-10.5) 28(20.45,-10) 29(20.45,-9.5) 30(20.45,-9) 31(20.45,-8.5) 32(20.45,-8) 33(20.45,-7.5) 34(20.45,-7) 35(20.45,-6.5) 36(20.45,-6) 37(20.45,-5.5) 38(20.45,-5) 39(20.45,-4.5) 40(20.45,-4) 41(20.45,-3.5) 42(20.45,-3) 43(20.45,-2.5) 44(20.45,-2) 45(20.45,-1.5) 46(20.45,-1) 47(20.45,-0.5) 48(20.45,0)
  silkscreen extent -1.5,-11.75 22.4,1
SOT23-5 [mil]
  rect 20x40 smd: 1(0,0) 2(37.4,0) 3(74.8,0) 4(74.8,110.24) 5(0,110.24)
  silkscreen extent -20,31 94,83
SOT23-BEC [mm]
  rect 0.914x1.27 smd: B(-0.95,-1.15) C(0,1.15) E(0.95,-1.15)
  silkscreen extent -1.46,-1.15 1.46,1.14
SOT23-GSD [mm]
  rect 0.914x1.27 smd: D(0,1.15) G(-0.95,-1.15) S(0.95,-1.15)
  silkscreen extent -1.46,-1.15 1.46,1.14
SOT-143 [mil]
  rect 45x50 smd: 1(0,0)
  rect 30x50 smd: 2(74.8,0) 3(74.8,100) 4(0,100)
  silkscreen extent -45,-42 110,120
SW4-SMD [mm]
  rect 1.524x2.048 smd: 1(-2.405,-4.06) 2(-2.405,4.06) 3(2.405,-4.06) 4(2.405,4.06)
  silkscreen extent -2.95,-6.35 2.29,2.29
SWDIP-4-2.54X7.62M [mil]
  rect 60x60 / inner round 60 / far side rect 60x60 hole 40: 1(0,0)
  round 60 hole 40: 2(100,0) 3(200,0) 4(300,0) 5(300,300) 6(200,300) 7(100,300) 8(0,300)
  silkscreen extent -70,-50 370,350
SWDIP-5-2.54X7.62M [mil]
  rect 60x60 / inner round 60 / far side rect 60x60 hole 40: 1(0,0)
  round 60 hole 40: 2(100,0) 3(200,0) 4(300,0) 5(400,0) 6(400,300) 7(300,300) 8(200,300) 9(100,300) 10(0,300)
  silkscreen extent -70,-50 470,350
SWDIP-6-2.54X7.62M [mil]
  rect 60x60 / inner round 60 / far side rect 60x60 hole 40: 1(0,0)
  round 60 hole 40: 2(100,0) 3(200,0) 4(300,0) 5(400,0) 6(500,0) 7(500,300) 8(400,300) 9(300,300) 10(200,300) 11(100,300) 12(0,300)
  silkscreen extent -70,-50 570,350
SWDIP-8-2.54X7.62M [mil]
  rect 60x60 / inner round 60 / far side rect 60x60 hole 40: 1(0,0)
  round 60 hole 40: 2(100,0) 3(200,0) 4(300,0) 5(400,0) 6(500,0) 7(600,0) 8(700,0) 9(700,300) 10(600,300) 11(500,300) 12(400,300) 13(300,300) 14(200,300) 15(100,300) 16(0,300)
  silkscreen extent -70,-50 770,350
TDFN2X2-8 [mm]
  oval 0.3x0.7 smd: 1(-0.75,-1) 2(-0.25,-1) 3(0.25,-1) 4(0.75,-1) 5(0.75,1) 6(0.25,1) 7(-0.25,1) 8(-0.75,1)
  rect 1.6x1 smd: 9(0,0)
  silkscreen extent -1,-1 1,1
TS6121C [mil]
  oval 30x70 smd: 1(-175,-165.5) 2(-125,-165.5) 3(-75,-165.5) 4(-25,-165.5) 5(25,-165.5) 6(75,-165.5) 7(125,-165.5) 8(175,-165.5) 9(175,165.5) 10(125,165.5) 11(75,165.5) 12(25,165.5) 13(-25,165.5) 14(-75,165.5) 15(-125,165.5) 16(-175,165.5)
  silkscreen extent -225,-240 225,270
TSOT-25 [mm]
  rect 0.56x0.82 smd: 1(-0.95,-1.144) 2(0,-1.144) 3(0.95,-1.144)
  rect 0.56x0.62 smd: 4(0.95,1.144) 5(-0.95,1.144)
  silkscreen extent -1.49,-2.14 1.49,0.84
TXC-9H_T9 [mm]
  rrect0% 1.9x1.9 smd: 1(0,0) 2(0,-3.1)
  silkscreen extent -1.2,-4 1.2,0.95
USB4P_ATYPE [mm]
  rect 1.5x1.5 hole 1: 1(-3.5,0)
  round 1.5 hole 1: 2(-1,0) 3(1,0) 4(3.5,0)
  round 2.8 hole 2.3: 5(6.57,-2.7) 6(-6.57,-2.7)
  silkscreen extent -6.48,-13 6.47,3.3
VIA40N(F_MASK)4L [mil]
  round 40 all layers, no hole mask+40: 1(0,0)
  Keep-Out Layer pour cut-out: 75,0 69.29,28.7 53.03,53.03 28.7,69.29 0,75 0,75 -28.7,69.29 -53.03,53.03 -69.29,28.7 -75,0 -75,0 -69.29,-28.7 -53.03,-53.03 -28.7,-69.29 0,-75 0,-75 28.7,-69.29 53.03,-53.03 69.29,-28.7 75,0
  silkscreen extent -60,-60 60,60
XRGBBCNANF-27MHZ [mm]
  rect 1.5x0.9 smd: 1(-1.325,-0.775) 2(1.325,-0.775) 3(1.325,0.775) 4(-1.325,0.775)
  silkscreen extent -1.6,-1.91 1.6,1.25

## Via types
v1: diameter 24, hole 12, Top to Bottom, 1202 vias
v2: diameter 30, hole 16, Top to Bottom, 581 vias